# EAGLE board AtariST microATX (EAGLE 7.7.0), part 1 of 4
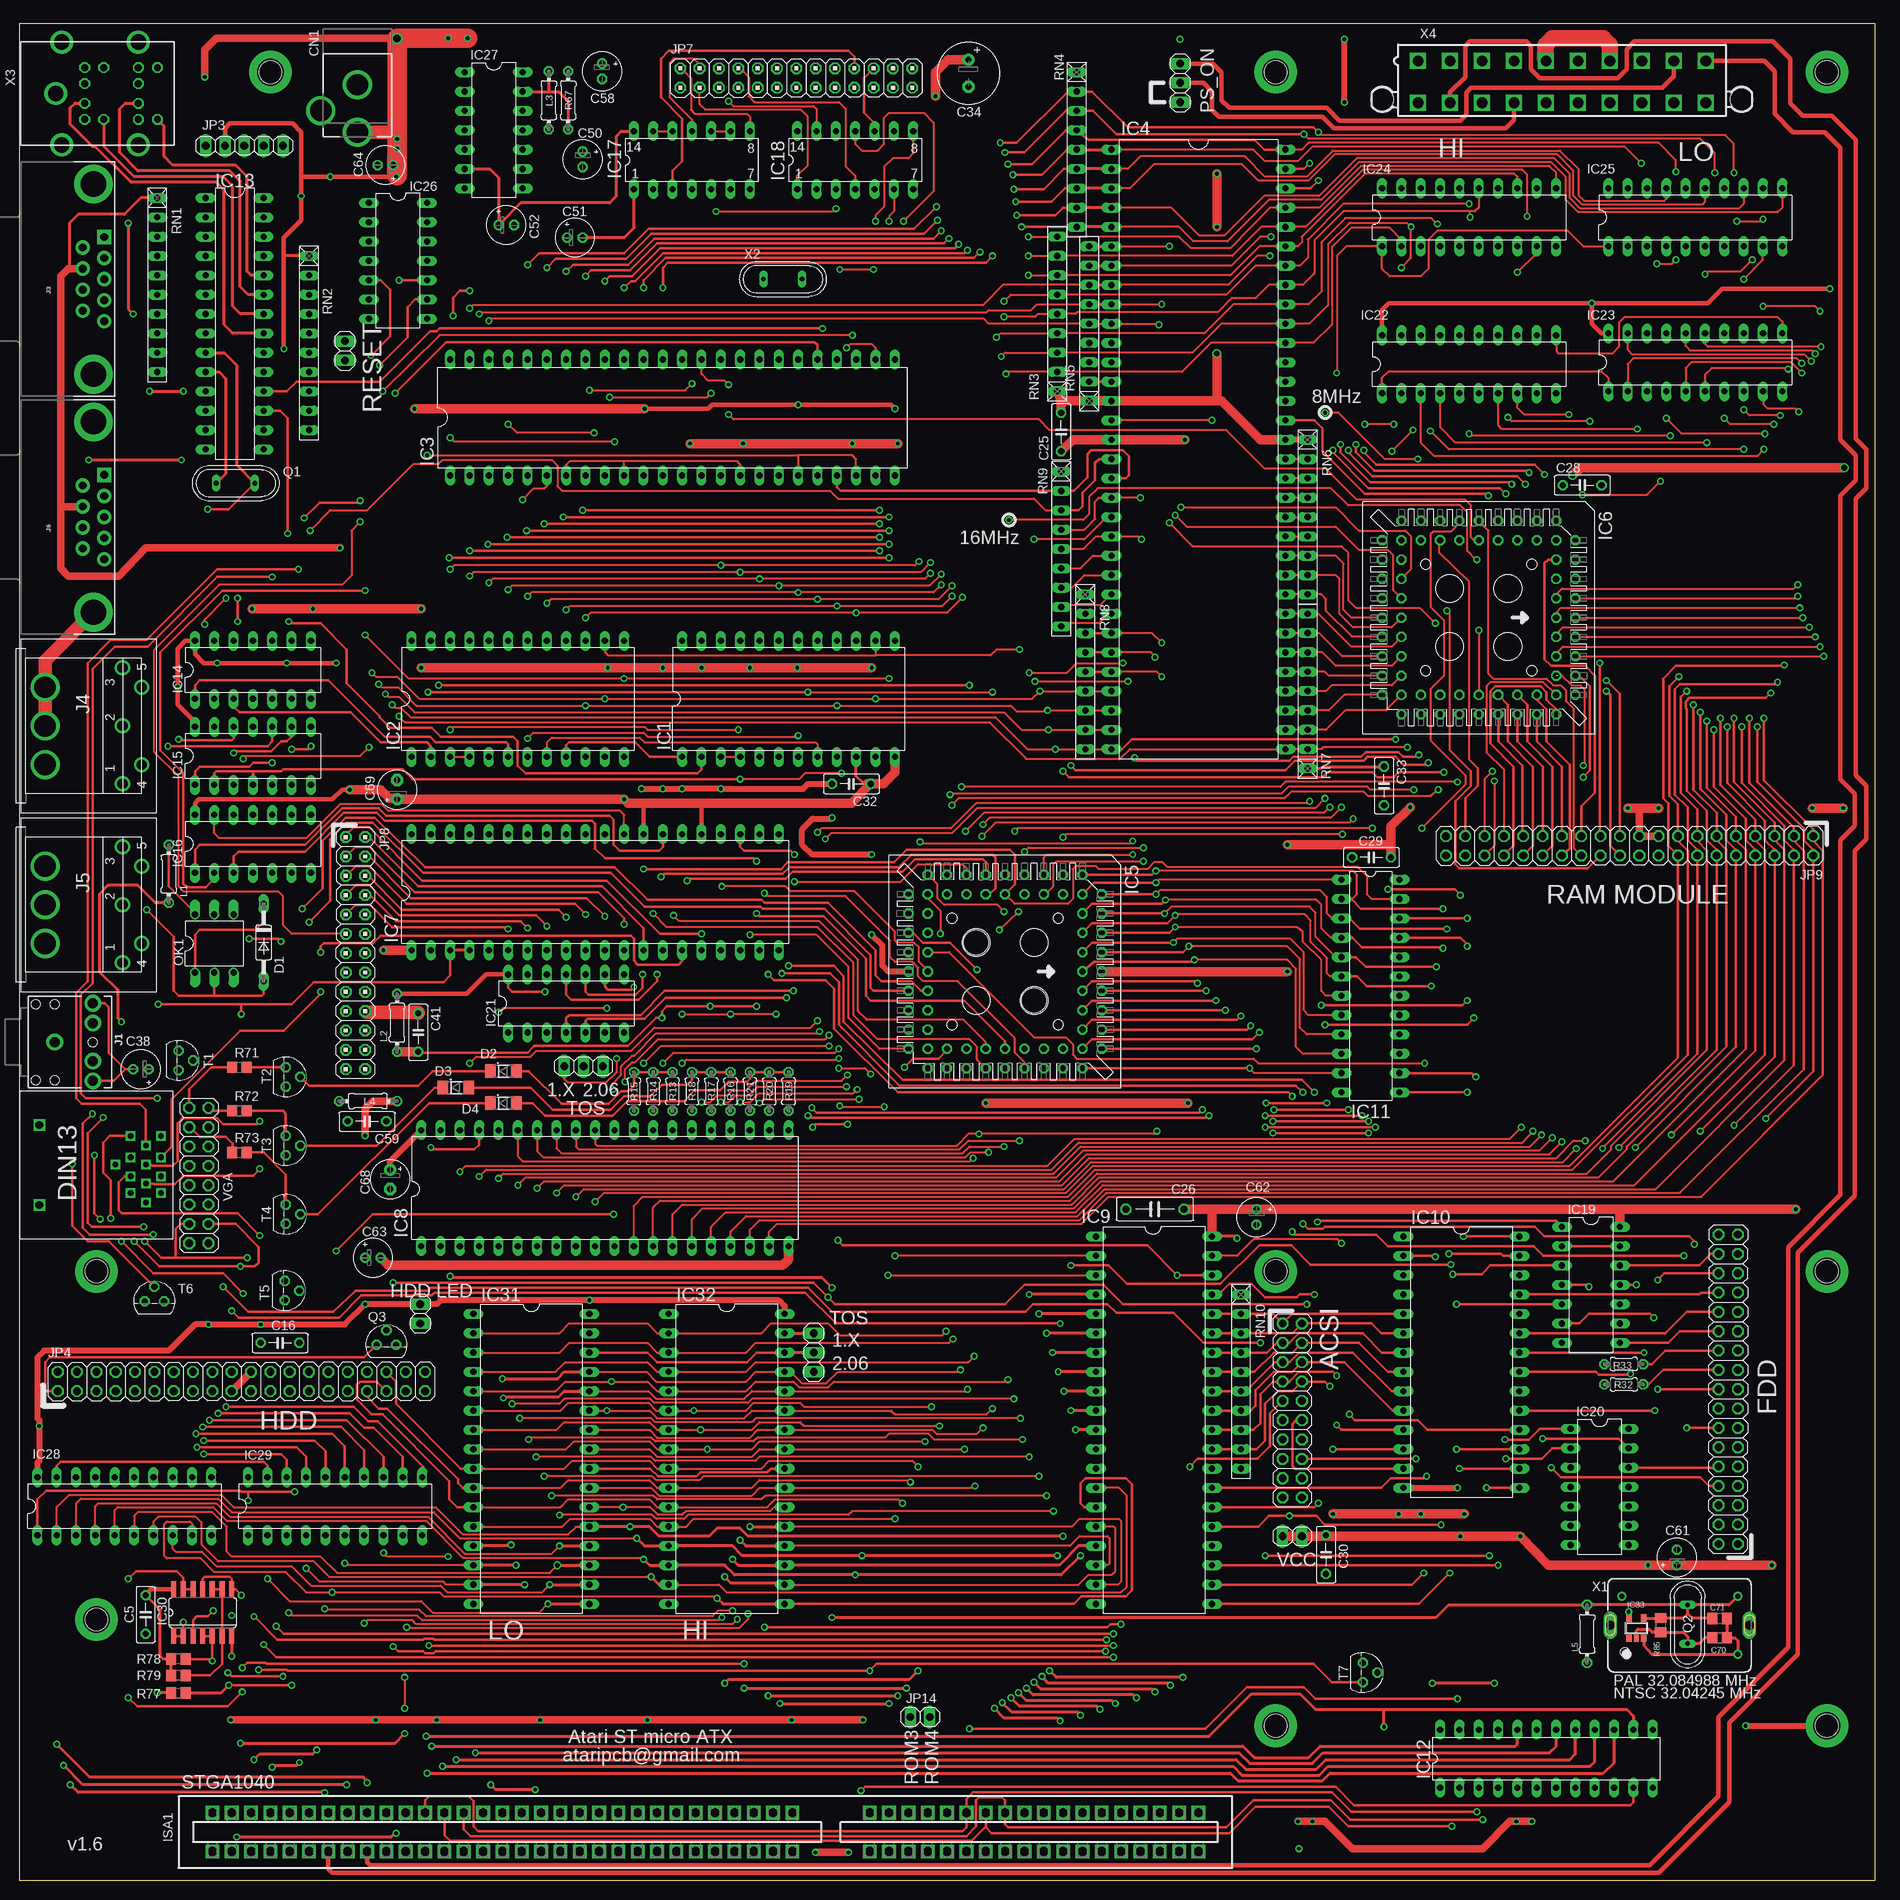
[diagram p0: board, top side]
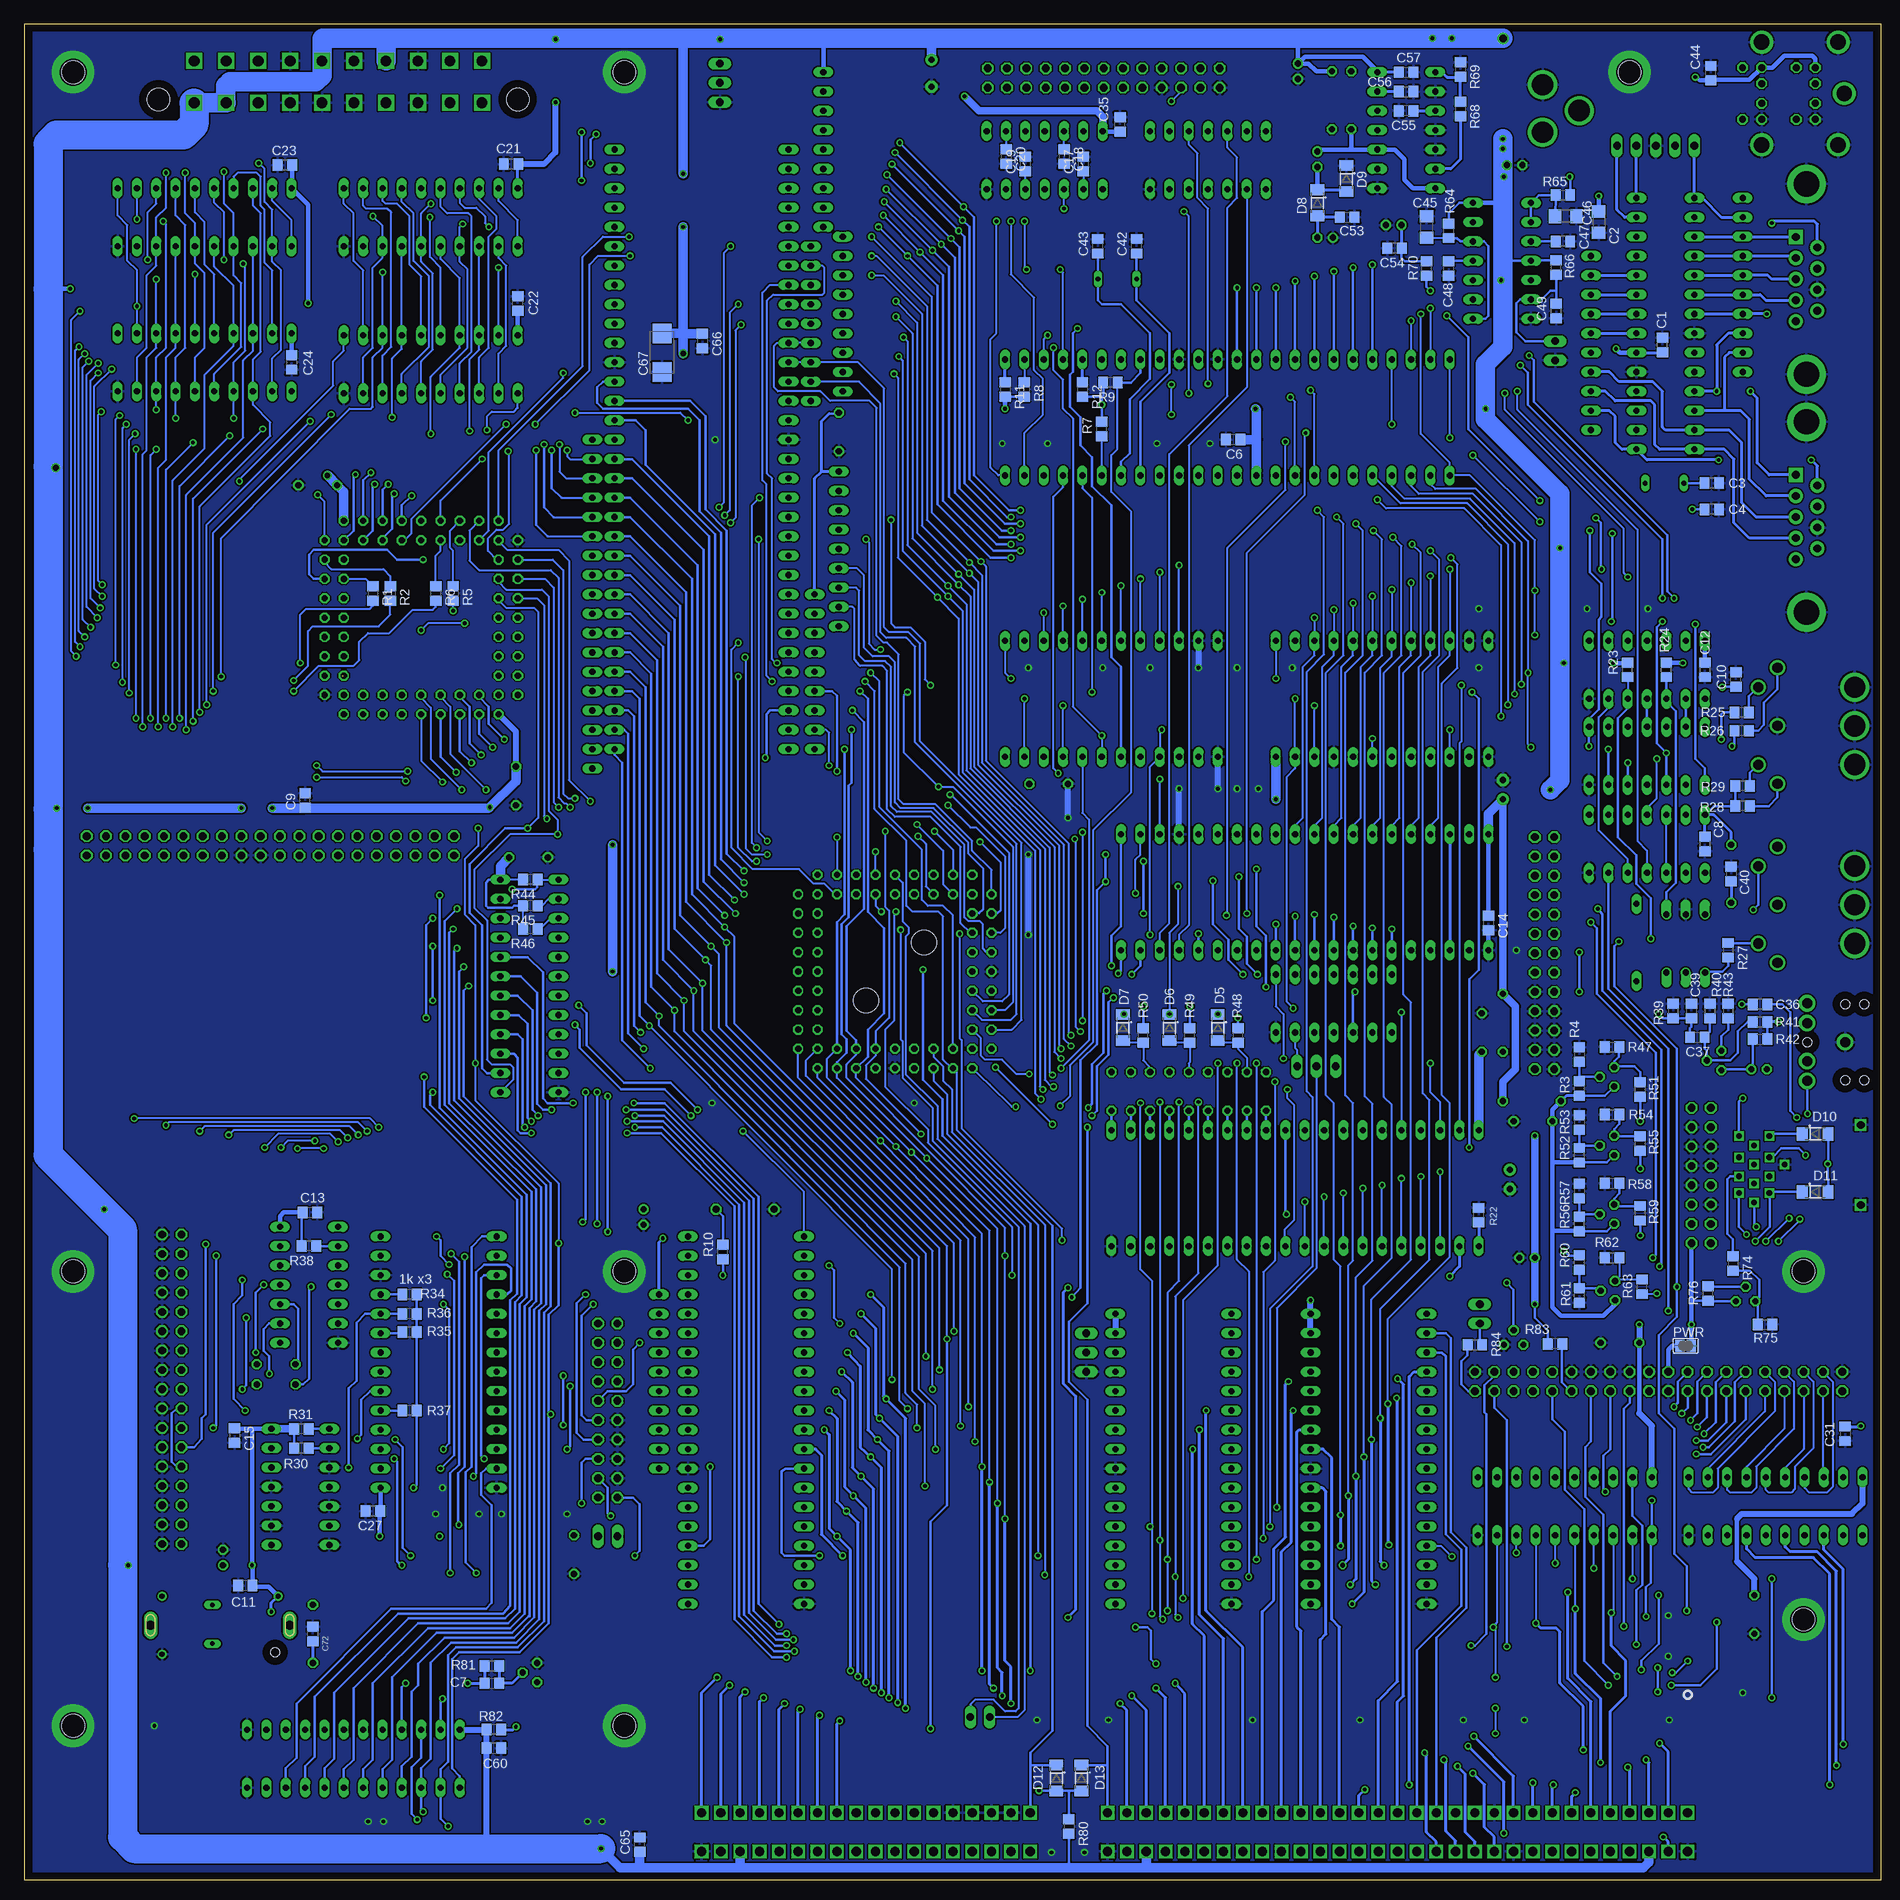
[diagram p1: board, bottom side, seen from below]

Size 243.84 x 243.84 mm. Coordinates in mm from the lower left corner, seen from the top.
Outline: 0,0 243.84,0 243.84,243.84 0,243.84 0,0
Copper layers (1*16): Top 0.035mm / dielectric 1.5mm / Bottom 0.035mm
Design rules "default": minimum track width 10mil, minimum drill 24mil, track to track 8mil, track to pad 8mil, pad to pad 8mil, via to via 8mil, smd to smd 8mil, copper to edge 40mil, drill to drill 8mil, minimum pad ring 10mil, minimum via ring 8mil, stop-mask expansion 4mil, vias tented up to drill 0mil, thermal gap 10mil
Holes 3 mm at 33.02,237.49 165.1,237.49 165.1,80.01 10.16,80.01 10.16,34.29 165.1,20.32 237.49,80.01 237.49,237.49 237.49,20.32
Holes 1.2 mm at 210.95,29.97
Holes 3.3 mm at 125.73,123.19 133.35,115.57

## Footprints (pad centres in the part's own frame; a part is rotated, then mirrored left to right if it is on the bottom)
C0805 = smd 1.3 x 1.5: 1 -0.95,0; 2 0.95,0
C1206 = smd 1.6 x 1.8: 1 -1.4,0; 2 1.4,0
C050-025X075 = drill 0.813 octagon: 1 -2.54,0; 2 2.54,0
C075-032X103 = drill 0.914 octagon: 1 -3.81,0; 2 3.81,0
E3,5-8 = drill 0.813 pad 1.6: + -1.778,0 | drill 0.813 pad 1.6 octagon: - 1.778,0
E2-5 = drill 0.813 pad 1.27: + -1.016,0 | drill 0.813 pad 1.27 octagon: - 1.016,0
C/6032-28R = smd 2.55 x 2.5: + 2.525,0; - -2.525,0
E2,5-5 = drill 0.813 pad 1.6: + -1.27,0 | drill 0.813 pad 1.6 octagon: - 1.27,0
DCJACK_2MM_PTH = drill 2.8: GND 0,7.35; GNDBREAK 4.8,10.75; PWR 0,13.6
DO35-10 = drill 0.813 long: A 5.08,0; C -5.08,0
SOD80_DO213AA_MINIMELF = smd 1.4 x 1.8: A 1.7,0; C -1.7,0
DIL24 = drill 0.813 long: 1 -13.97,-7.62; 2 -11.43,-7.62; 3 -8.89,-7.62; 4 -6.35,-7.62; 5 -3.81,-7.62; 6 -1.27,-7.62; 7 1.27,-7.62; 8 3.81,-7.62; 9 6.35,-7.62; 10 8.89,-7.62; 11 11.43,-7.62; 12 13.97,-7.62; 13 13.97,7.62; 14 11.43,7.62; 15 8.89,7.62; 16 6.35,7.62; 17 3.81,7.62; 18 1.27,7.62; 19 -1.27,7.62; 20 -3.81,7.62; 21 -6.35,7.62; 22 -8.89,7.62; 23 -11.43,7.62; 24 -13.97,7.62
DIL48 = drill 0.813 long: 1 -29.21,-7.62; 2 -26.67,-7.62; 3 -24.13,-7.62; 4 -21.59,-7.62; 5 -19.05,-7.62; 6 -16.51,-7.62; 7 -13.97,-7.62; 8 -11.43,-7.62; 9 -8.89,-7.62; 10 -6.35,-7.62; 11 -3.81,-7.62; 12 -1.27,-7.62; 13 1.27,-7.62; 14 3.81,-7.62; 15 6.35,-7.62; 16 8.89,-7.62; 17 11.43,-7.62; 18 13.97,-7.62; 19 16.51,-7.62; 20 19.05,-7.62; 21 21.59,-7.62; 22 24.13,-7.62; 23 26.67,-7.62; 24 29.21,-7.62; 25 29.21,7.62; 26 26.67,7.62; 27 24.13,7.62; 28 21.59,7.62; 29 19.05,7.62; 30 16.51,7.62; 31 13.97,7.62; 32 11.43,7.62; 33 8.89,7.62; 34 6.35,7.62; 35 3.81,7.62; 36 1.27,7.62; 37 -1.27,7.62; 38 -3.81,7.62; 39 -6.35,7.62; 40 -8.89,7.62; 41 -11.43,7.62; 42 -13.97,7.62; 43 -16.51,7.62; 44 -19.05,7.62; 45 -21.59,7.62; 46 -24.13,7.62; 47 -26.67,7.62; 48 -29.21,7.62
DIL64 = drill 0.813 long: 1 -39.37,-11.43; 2 -36.83,-11.43; 3 -34.29,-11.43; 4 -31.75,-11.43; 5 -29.21,-11.43; 6 -26.67,-11.43; 7 -24.13,-11.43; 8 -21.59,-11.43; 9 -19.05,-11.43; 10 -16.51,-11.43; 11 -13.97,-11.43; 12 -11.43,-11.43; 13 -8.89,-11.43; 14 -6.35,-11.43; 15 -3.81,-11.43; 16 -1.27,-11.43; 17 1.27,-11.43; 18 3.81,-11.43; 19 6.35,-11.43; 20 8.89,-11.43; 21 11.43,-11.43; 22 13.97,-11.43; 23 16.51,-11.43; 24 19.05,-11.43; 25 21.59,-11.43; 26 24.13,-11.43; 27 26.67,-11.43; 28 29.21,-11.43; 29 31.75,-11.43; 30 34.29,-11.43; 31 36.83,-11.43; 32 39.37,-11.43; 33 39.37,11.43; 34 36.83,11.43; 35 34.29,11.43; 36 31.75,11.43; 37 29.21,11.43; 38 26.67,11.43; 39 24.13,11.43; 40 21.59,11.43; 41 19.05,11.43; 42 16.51,11.43; 43 13.97,11.43; 44 11.43,11.43; 45 8.89,11.43; 46 6.35,11.43; 47 3.81,11.43; 48 1.27,11.43; 49 -1.27,11.43; 50 -3.81,11.43; 51 -6.35,11.43; 52 -8.89,11.43; 53 -11.43,11.43; 54 -13.97,11.43; 55 -16.51,11.43; 56 -19.05,11.43; 57 -21.59,11.43; 58 -24.13,11.43; 59 -26.67,11.43; 60 -29.21,11.43; 61 -31.75,11.43; 62 -34.29,11.43; 63 -36.83,11.43; 64 -39.37,11.43
PLCC68 = drill 0.813 octagon: 1 0,12.7; 2 0,10.16; 3 -2.54,12.7; 4 -2.54,10.16; 5 -5.08,12.7; 6 -5.08,10.16; 7 -7.62,12.7; 8 -7.62,10.16; 9 -10.16,12.7; 10 -12.7,10.16; 11 -10.16,10.16; 12 -12.7,7.62; 13 -10.16,7.62; 14 -12.7,5.08; 15 -10.16,5.08; 16 -12.7,2.54; 17 -10.16,2.54; 18 -12.7,0; 19 -10.16,0; 20 -12.7,-2.54; 21 -10.16,-2.54; 22 -12.7,-5.08; 23 -10.16,-5.08; 24 -12.7,-7.62; 25 -10.16,-7.62; 26 -12.7,-10.16; 27 -10.16,-12.7; 28 -10.16,-10.16; 29 -7.62,-12.7; 30 -7.62,-10.16; 31 -5.08,-12.7; 32 -5.08,-10.16; 33 -2.54,-12.7; 34 -2.54,-10.16; 35 0,-12.7; 36 0,-10.16; 37 2.54,-12.7; 38 2.54,-10.16; 39 5.08,-12.7; 40 5.08,-10.16; 41 7.62,-12.7; 42 7.62,-10.16; 43 10.16,-12.7; 44 12.7,-10.16; 45 10.16,-10.16; 46 12.7,-7.62; 47 10.16,-7.62; 48 12.7,-5.08; 49 10.16,-5.08; 50 12.7,-2.54; 51 10.16,-2.54; 52 12.7,0; 53 10.16,0; 54 12.7,2.54; 55 10.16,2.54; 56 12.7,5.08; 57 10.16,5.08; 58 12.7,7.62; 59 10.16,7.62; 60 12.7,10.16; 61 10.16,12.7; 62 10.16,10.16; 63 7.62,12.7; 64 7.62,10.16; 65 5.08,12.7; 66 5.08,10.16; 67 2.54,12.7; 68 2.54,10.16
DIL40 = drill 0.813 long: 1 -24.13,-7.62; 2 -21.59,-7.62; 3 -19.05,-7.62; 4 -16.51,-7.62; 5 -13.97,-7.62; 6 -11.43,-7.62; 7 -8.89,-7.62; 8 -6.35,-7.62; 9 -3.81,-7.62; 10 -1.27,-7.62; 11 1.27,-7.62; 12 3.81,-7.62; 13 6.35,-7.62; 14 8.89,-7.62; 15 11.43,-7.62; 16 13.97,-7.62; 17 16.51,-7.62; 18 19.05,-7.62; 19 21.59,-7.62; 20 24.13,-7.62; 21 24.13,7.62; 22 21.59,7.62; 23 19.05,7.62; 24 16.51,7.62; 25 13.97,7.62; 26 11.43,7.62; 27 8.89,7.62; 28 6.35,7.62; 29 3.81,7.62; 30 1.27,7.62; 31 -1.27,7.62; 32 -3.81,7.62; 33 -6.35,7.62; 34 -8.89,7.62; 35 -11.43,7.62; 36 -13.97,7.62; 37 -16.51,7.62; 38 -19.05,7.62; 39 -21.59,7.62; 40 -24.13,7.62
DIL28 = drill 0.813 long: 1 -16.51,-7.62; 2 -13.97,-7.62; 3 -11.43,-7.62; 4 -8.89,-7.62; 5 -6.35,-7.62; 6 -3.81,-7.62; 7 -1.27,-7.62; 8 1.27,-7.62; 9 3.81,-7.62; 10 6.35,-7.62; 11 8.89,-7.62; 12 11.43,-7.62; 13 13.97,-7.62; 14 16.51,-7.62; 15 16.51,7.62; 16 13.97,7.62; 17 11.43,7.62; 18 8.89,7.62; 19 6.35,7.62; 20 3.81,7.62; 21 1.27,7.62; 22 -1.27,7.62; 23 -3.81,7.62; 24 -6.35,7.62; 25 -8.89,7.62; 26 -11.43,7.62; 27 -13.97,7.62; 28 -16.51,7.62
DIL24-3 = drill 0.813 long: 1 -13.97,-3.81; 2 -11.43,-3.81; 3 -8.89,-3.81; 4 -6.35,-3.81; 5 -3.81,-3.81; 6 -1.27,-3.81; 7 1.27,-3.81; 8 3.81,-3.81; 9 6.35,-3.81; 10 8.89,-3.81; 11 11.43,-3.81; 12 13.97,-3.81; 13 13.97,3.81; 14 11.43,3.81; 15 8.89,3.81; 16 6.35,3.81; 17 3.81,3.81; 18 1.27,3.81; 19 -1.27,3.81; 20 -3.81,3.81; 21 -6.35,3.81; 22 -8.89,3.81; 23 -11.43,3.81; 24 -13.97,3.81
DIL28-3 = drill 0.813 long: 1 -16.51,-3.81; 2 -13.97,-3.81; 3 -11.43,-3.81; 4 -8.89,-3.81; 5 -6.35,-3.81; 6 -3.81,-3.81; 7 -1.27,-3.81; 8 1.27,-3.81; 9 3.81,-3.81; 10 6.35,-3.81; 11 8.89,-3.81; 12 11.43,-3.81; 13 13.97,-3.81; 14 16.51,-3.81; 15 16.51,3.81; 16 13.97,3.81; 17 11.43,3.81; 18 8.89,3.81; 19 6.35,3.81; 20 3.81,3.81; 21 1.27,3.81; 22 -1.27,3.81; 23 -3.81,3.81; 24 -6.35,3.81; 25 -8.89,3.81; 26 -11.43,3.81; 27 -13.97,3.81; 28 -16.51,3.81
DIL14 = drill 0.813 long: 1 -7.62,-3.81; 2 -5.08,-3.81; 3 -2.54,-3.81; 4 0,-3.81; 5 2.54,-3.81; 6 5.08,-3.81; 7 7.62,-3.81; 8 7.62,3.81; 9 5.08,3.81; 10 2.54,3.81; 11 0,3.81; 12 -2.54,3.81; 13 -5.08,3.81; 14 -7.62,3.81
DIL14' = drill 0.8 long: 1 -7.62,-3.81; 2 -5.08,-3.81; 3 -2.54,-3.81; 4 0,-3.81; 5 2.54,-3.81; 6 5.08,-3.81; 7 7.62,-3.81; 8 7.62,3.81; 9 5.08,3.81; 10 2.54,3.81; 11 0,3.81; 12 -2.54,3.81; 13 -5.08,3.81; 14 -7.62,3.81
DIL20 = drill 0.813 long: 1 -11.43,-3.81; 2 -8.89,-3.81; 3 -6.35,-3.81; 4 -3.81,-3.81; 5 -1.27,-3.81; 6 1.27,-3.81; 7 3.81,-3.81; 8 6.35,-3.81; 9 8.89,-3.81; 10 11.43,-3.81; 11 11.43,3.81; 12 8.89,3.81; 13 6.35,3.81; 14 3.81,3.81; 15 1.27,3.81; 16 -1.27,3.81; 17 -3.81,3.81; 18 -6.35,3.81; 19 -8.89,3.81; 20 -11.43,3.81
SO14 = smd 0.66 x 2.032: 1 -3.81,-3.073; 2 -2.54,-3.073; 3 -1.27,-3.073; 4 0,-3.073; 5 1.27,-3.073; 6 2.54,-3.073; 7 3.81,-3.073; 8 3.81,3.073; 9 2.54,3.073; 10 1.27,3.073; 11 0,3.073; 12 -1.27,3.073; 13 -2.54,3.073; 14 -3.81,3.073
DIL32 = drill 0.813 long: 1 -19.05,-7.62; 2 -16.51,-7.62; 3 -13.97,-7.62; 4 -11.43,-7.62; 5 -8.89,-7.62; 6 -6.35,-7.62; 7 -3.81,-7.62; 8 -1.27,-7.62; 9 1.27,-7.62; 10 3.81,-7.62; 11 6.35,-7.62; 12 8.89,-7.62; 13 11.43,-7.62; 14 13.97,-7.62; 15 16.51,-7.62; 16 19.05,-7.62; 17 19.05,7.62; 18 16.51,7.62; 19 13.97,7.62; 20 11.43,7.62; 21 8.89,7.62; 22 6.35,7.62; 23 3.81,7.62; 24 1.27,7.62; 25 -1.27,7.62; 26 -3.81,7.62; 27 -6.35,7.62; 28 -8.89,7.62; 29 -11.43,7.62; 30 -13.97,7.62; 31 -16.51,7.62; 32 -19.05,7.62
SOT23-5 = smd 0.69 x 0.99: 1 -0.95,-1.29; 2 0,-1.29; 3 0.95,-1.29; 4 0.95,1.3; 5 -0.95,1.3
ISA-16 = drill 1.2 pad 1.778 square: A1 81.28,-2.54; A2 78.74,-2.54; A3 76.2,-2.54; A4 73.66,-2.54; A5 71.12,-2.54; A6 68.58,-2.54; A7 66.04,-2.54; A8 63.5,-2.54; A9 60.96,-2.54; A10 58.42,-2.54; A11 55.88,-2.54; A12 53.34,-2.54; A13 50.8,-2.54; A14 48.26,-2.54; A15 45.72,-2.54; A16 43.18,-2.54; A17 40.64,-2.54; A18 38.1,-2.54; A19 35.56,-2.54; A20 33.02,-2.54; A21 30.48,-2.54; A22 27.94,-2.54; A23 25.4,-2.54; A24 22.86,-2.54; A25 20.32,-2.54; A26 17.78,-2.54; A27 15.24,-2.54; A28 12.7,-2.54; A29 10.16,-2.54; A30 7.62,-2.54; A31 5.08,-2.54; B1 81.28,2.54; B2 78.74,2.54; B3 76.2,2.54; B4 73.66,2.54; B5 71.12,2.54; B6 68.58,2.54; B7 66.04,2.54; B8 63.5,2.54; B9 60.96,2.54; B10 58.42,2.54; B11 55.88,2.54; B12 53.34,2.54; B13 50.8,2.54; B14 48.26,2.54; B15 45.72,2.54; B16 43.18,2.54; B17 40.64,2.54; B18 38.1,2.54; B19 35.56,2.54; B20 33.02,2.54; B21 30.48,2.54; B22 27.94,2.54; B23 25.4,2.54; B24 22.86,2.54; B25 20.32,2.54; B26 17.78,2.54; B27 15.24,2.54; B28 12.7,2.54; B29 10.16,2.54; B30 7.62,2.54; B31 5.08,2.54; C1 -5.08,-2.54; C2 -7.62,-2.54; C3 -10.16,-2.54; C4 -12.7,-2.54; C5 -15.24,-2.54; C6 -17.78,-2.54; C7 -20.32,-2.54; C8 -22.86,-2.54; C9 -25.4,-2.54; C10 -27.94,-2.54; C11 -30.48,-2.54; C12 -33.02,-2.54; C13 -35.56,-2.54; C14 -38.1,-2.54; C15 -40.64,-2.54; C16 -43.18,-2.54; C17 -45.72,-2.54; C18 -48.26,-2.54; D1 -5.08,2.54; D2 -7.62,2.54; D3 -10.16,2.54; D4 -12.7,2.54; D5 -15.24,2.54; D6 -17.78,2.54; D7 -20.32,2.54; D8 -22.86,2.54; D9 -25.4,2.54; D10 -27.94,2.54; D11 -30.48,2.54; D12 -33.02,2.54; D13 -35.56,2.54; D14 -38.1,2.54; D15 -40.64,2.54; D16 -43.18,2.54; D17 -45.72,2.54; D18 -48.26,2.54
AUDIO-JACK-KIT = drill 1.3 pad 2.184: RING 5,5.1; RSH 5,2.5; SLEEVE 0,0; TIP 5,-5.1; TSH 5,-2.5 | hole 1.2: 0,5; -2.5,5; -2.5,-5; 0,-5; 5,0
DB9_MALE = drill 1.016 pad 1.88 square: 1 5.54,-1.42 | drill 1.016 pad 1.88: 2 2.77,-1.42; 3 0,-1.42; 4 -2.77,-1.42; 5 -5.54,-1.42; 6 4.15,1.42; 7 1.38,1.42; 8 -1.38,1.42; 9 -4.15,1.42 | drill 3.302 pad 5.08: G1 -12.5,0; G2 12.5,0
DIN5 = drill 1.321: 1 -7.62,-6.35; 2 0,-6.35; 3 7.62,-6.35; 4 -5.08,-8.89; 5 5.08,-8.89 | drill 2.8: SHIELD1 5.08,3.81; SHIELD2 0,3.81; SHIELD3 -5.08,3.81
1X02 = drill 1.016 long: 1 -1.27,0; 2 1.27,0
1X05 = drill 1.016 long: 1 -5.08,0; 2 -2.54,0; 3 0,0; 4 2.54,0; 5 5.08,0
2X20 = drill 1.016 octagon: 1 -24.13,-1.27; 2 -24.13,1.27; 3 -21.59,-1.27; 4 -21.59,1.27; 5 -19.05,-1.27; 6 -19.05,1.27; 7 -16.51,-1.27; 8 -16.51,1.27; 9 -13.97,-1.27; 10 -13.97,1.27; 11 -11.43,-1.27; 12 -11.43,1.27; 13 -8.89,-1.27; 14 -8.89,1.27; 15 -6.35,-1.27; 16 -6.35,1.27; 17 -3.81,-1.27; 18 -3.81,1.27; 19 -1.27,-1.27; 20 -1.27,1.27; 21 1.27,-1.27; 22 1.27,1.27; 23 3.81,-1.27; 24 3.81,1.27; 25 6.35,-1.27; 26 6.35,1.27; 27 8.89,-1.27; 28 8.89,1.27; 29 11.43,-1.27; 30 11.43,1.27; 31 13.97,-1.27; 32 13.97,1.27; 33 16.51,-1.27; 34 16.51,1.27; 35 19.05,-1.27; 36 19.05,1.27; 37 21.59,-1.27; 38 21.59,1.27; 39 24.13,-1.27; 40 24.13,1.27
2X17 = drill 1.016 octagon: 1 -20.32,-1.27; 2 -20.32,1.27; 3 -17.78,-1.27; 4 -17.78,1.27; 5 -15.24,-1.27; 6 -15.24,1.27; 7 -12.7,-1.27; 8 -12.7,1.27; 9 -10.16,-1.27; 10 -10.16,1.27; 11 -7.62,-1.27; 12 -7.62,1.27; 13 -5.08,-1.27; 14 -5.08,1.27; 15 -2.54,-1.27; 16 -2.54,1.27; 17 0,-1.27; 18 0,1.27; 19 2.54,-1.27; 20 2.54,1.27; 21 5.08,-1.27; 22 5.08,1.27; 23 7.62,-1.27; 24 7.62,1.27; 25 10.16,-1.27; 26 10.16,1.27; 27 12.7,-1.27; 28 12.7,1.27; 29 15.24,-1.27; 30 15.24,1.27; 31 17.78,-1.27; 32 17.78,1.27; 33 20.32,-1.27; 34 20.32,1.27
2X10 = drill 1.016 octagon: 1 -11.43,-1.27; 2 -11.43,1.27; 3 -8.89,-1.27; 4 -8.89,1.27; 5 -6.35,-1.27; 6 -6.35,1.27; 7 -3.81,-1.27; 8 -3.81,1.27; 9 -1.27,-1.27; 10 -1.27,1.27; 11 1.27,-1.27; 12 1.27,1.27; 13 3.81,-1.27; 14 3.81,1.27; 15 6.35,-1.27; 16 6.35,1.27; 17 8.89,-1.27; 18 8.89,1.27; 19 11.43,-1.27; 20 11.43,1.27
2X13 = drill 1.016 octagon: 1 -15.24,-1.27; 2 -15.24,1.27; 3 -12.7,-1.27; 4 -12.7,1.27; 5 -10.16,-1.27; 6 -10.16,1.27; 7 -7.62,-1.27; 8 -7.62,1.27; 9 -5.08,-1.27; 10 -5.08,1.27; 11 -2.54,-1.27; 12 -2.54,1.27; 13 0,-1.27; 14 0,1.27; 15 2.54,-1.27; 16 2.54,1.27; 17 5.08,-1.27; 18 5.08,1.27; 19 7.62,-1.27; 20 7.62,1.27; 21 10.16,-1.27; 22 10.16,1.27; 23 12.7,-1.27; 24 12.7,1.27; 25 15.24,-1.27; 26 15.24,1.27
1X03 = drill 1.016 long: 1 -2.54,0; 2 0,0; 3 2.54,0
0204/7 = drill 0.813 octagon: 1 -3.81,0; 2 3.81,0
DIL06 = drill 0.813 offset: 1 -2.54,-3.81; 2 0,-3.81; 3 2.54,-3.81; 4 2.54,3.81; 5 0,3.81; 6 -2.54,3.81
SJ = smd 1.168 x 1.6: 1 -0.762,0; 2 0.762,0
QS = drill 0.61 long: 1 -2.54,0; 2 2.54,0
TO92 = drill 0.813 octagon: 1 1.27,0; 2 0,1.905; 3 -1.27,0
R0805 = smd 1.3 x 1.5: 1 -0.95,0; 2 0.95,0
0204/5 = drill 0.813 octagon: 1 -2.54,0; 2 2.54,0
RN-10 = drill 0.813 long: 1 -11.43,0; 2 -8.89,0; 3 -6.35,0; 4 -3.81,0; 5 -1.27,0; 6 1.27,0; 7 3.81,0; 8 6.35,0; 9 8.89,0; 10 11.43,0
RN-9 = drill 0.813 long: 1 -10.16,0; 2 -7.62,0; 3 -5.08,0; 4 -2.54,0; 5 0,0; 6 2.54,0; 7 5.08,0; 8 7.62,0; 9 10.16,0
DIN-13 = drill 1 square: M1 -5.25,7.5; M2 5.25,7.5 | drill 0.75 square: PIN1 -3.7,-8.5; PIN2 -1.5,-8.5; PIN3 1,-8.5; PIN4 3.8,-8.5; PIN5 -4.95,-6.5; PIN6 -2.45,-6.5; PIN7 0.05,-6.5; PIN8 2.55,-6.5; PIN9 -3.7,-4.5; PIN10 -1.5,-4.5; PIN11 1,-4.5; PIN12 3.8,-4.5; PIN13 0.05,-2.5
2X08 = drill 1.016 octagon: 1 -8.89,-1.27; 2 -8.89,1.27; 3 -6.35,-1.27; 4 -6.35,1.27; 5 -3.81,-1.27; 6 -3.81,1.27; 7 -1.27,-1.27; 8 -1.27,1.27; 9 1.27,-1.27; 10 1.27,1.27; 11 3.81,-1.27; 12 3.81,1.27; 13 6.35,-1.27; 14 6.35,1.27; 15 8.89,-1.27; 16 8.89,1.27
TC46 = drill 0.7 pad 1.016: 7 7.62,-3.81; 8 7.62,3.81; 14 -7.62,3.81 | drill 1.2 pad 1.6 long: S@1 -9.144,0 | drill 1.2 pad 1.5 long: S@2 9.144,0
SSV-BD06 = drill 0.9 octagon: 1-1 1.3,8.5; 1-2 -1.3,8.5; 1-3 3.4,8.5; 1-4 -3.4,8.5; 1-5 3.4,11; 1-6 -3.4,11; 2-1 1.3,15.55; 2-2 -1.3,15.55; 2-3 3.4,15.55; 2-4 -3.4,15.55; 2-5 3.4,18.05; 2-6 -3.4,18.05 | drill 2: G1 -6.75,15.55; G2 6.75,15.55; G3 -6.75,5.5; G4 6.75,5.5; GND 0,4.7
5566-20 = drill 1.4 square: 1 18.9,-2.75; 2 14.7,-2.75; 3 10.5,-2.75; 4 6.3,-2.75; 5 2.1,-2.75; 6 -2.1,-2.75; 7 -6.3,-2.75; 8 -10.5,-2.75; 9 -14.7,-2.75; 10 -18.9,-2.75; 11 18.9,2.75; 12 14.7,2.75; 13 10.5,2.75; 14 6.3,2.75; 15 2.1,2.75; 16 -2.1,2.75; 17 -6.3,2.75; 18 -10.5,2.75; 19 -14.7,2.75; 20 -18.9,2.75 | hole 3: 23.6,2.29; -23.6,2.29

## Placement (x,y rotation side)
C1  100n  [C0805]  28.7,201.68 90 bottom
C2  10u  [C1206]  37.08,217.81 270 bottom
C3  22p  [C0805]  22.23,183.51 180 bottom
C4  22p  [C0805]  22.23,180.09 180 bottom
C5  [C050-025X075]  16.64,34.92 270 top
C6  [C0805]  85.09,189.23 180 bottom
C7  100p  [C0805]  182.5,25.91 0 bottom
C8  [C0805]  23.11,136.14 270 bottom
C9  [C0805]  207.01,141.86 90 bottom
C10  [C0805]  19.05,157.73 90 bottom
C11  [C0805]  214.88,38.73 180 bottom
C12  [C0805]  23.11,159 270 bottom
C13  [C0805]  206.38,87.76 0 bottom
C14  [C0805]  51.56,125.73 270 bottom
C15  [C0805]  216.28,58.42 270 bottom
C16  [C050-025X075]  34.29,70.61 0 top
C17  100p  [C0805]  104.78,225.43 90 bottom
C18  100p  [C0805]  107.31,226.44 270 bottom
C19  100p  [C0805]  112.39,225.43 90 bottom
C20  100p  [C0805]  114.94,226.44 270 bottom
C21  [C0805]  179.96,225.43 180 bottom
C22  [C0805]  179.07,207.14 90 bottom
C23  [C0805]  209.68,225.3 180 bottom
C24  [C0805]  208.79,199.39 270 bottom
C25  [C050-025X075]  136.91,190.25 270 top
C26  [C075-032X103]  149.22,88.14 180 top
C27  [C0805]  198.12,48.51 180 bottom
C28  [C050-025X075]  205.36,183.26 0 top
C29  [C050-025X075]  177.67,134.37 180 top
C30  [C050-025X075]  171.7,42.8 270 top
C31  [C0805]  4.7,58.67 270 bottom
C32  [C050-025X075]  109.35,144.02 180 top
C33  [C050-025X075]  179.32,143.76 270 top
C34  470u  [E3,5-8]  124.71,237.36 270 top
C35  [C0805]  99.95,230.63 90 bottom
C36  1u  [C0805]  15.88,115.06 180 bottom
C37  1u  [C0805]  24.13,110.74 0 bottom
C38  47u  [E2-5]  16,106.55 180 top
C39  100n  [C0805]  24.89,114.17 270 bottom
C40  100n  [C0805]  19.68,132.21 270 bottom
C41  100n  [C050-025X075]  52.45,111.38 270 top
C42  30p  [C0805]  97.79,214.63 90 bottom
C43  30p  [C0805]  102.87,214.63 90 bottom
C44  [C0805]  22.35,237.36 90 bottom
C45  22u  [C1206]  59.69,217.17 270 bottom
C46  22u  [C1206]  41.4,218.57 180 bottom
C47  10n  [C0805]  41.78,215.26 180 bottom
C48  10n  [C0805]  56.77,211.71 90 bottom
C49  100n  [C0805]  42.67,206.12 90 bottom
C50  4u7  [E2-5]  74.04,226.06 270 top
C51  4u7  [E2-5]  73.03,215.77 0 top
C52  4u7  [E2-5]  64.01,217.42 0 top
C53  100n  [C0805]  70.1,218.44 0 bottom
C54  100n  [C0805]  63.88,214.38 180 bottom
C55  330p  [C0805]  62.36,232.41 180 bottom
C56  150p  [C0805]  62.36,234.95 0 bottom
C57  100n  [C0805]  62.36,237.49 0 bottom
C58  10u  [E2-5]  76.58,237.62 270 top
C59  [C050-025X075]  45.72,99.69 0 top
C60  [C0805]  182.25,17.4 0 bottom
C61  47u  [E2-5]  217.81,42.42 90 top
C62  47  [E2-5]  162.56,87.12 270 top
C63  47u  [E2-5]  46.48,81.79 0 top
C64  47u  [E2-5]  48.13,225.3 180 top
C65  10u  [C0805]  163.07,4.7 90 bottom
C66  [C0805]  154.81,202.18 270 bottom
C67  [C/6032-28R]  160.15,200.66 90 bottom
C68  47u  [E2,5-5]  48.77,92.08 270 top
C69  47u  [E2,5-5]  49.66,143.26 90 top
C70  15p  [C0805]  223.39,31.88 0 top
C71  15p  [C0805]  223.39,34.42 0 top
C72  opt  [C0805]  205.99,32.38 90 bottom
CN1  [DCJACK_2MM_PTH]  44.45,243.21 180 top
D1  1N914  [DO35-10]  32.13,123.19 270 top
D2  LL4148  [SOD80_DO213AA_MINIMELF]  63.63,106.3 0 top
D3  LL4148  [SOD80_DO213AA_MINIMELF]  57.4,104.14 0 top
D4  LL4148  [SOD80_DO213AA_MINIMELF]  63.63,102.11 0 top
D5  LL4148  [SOD80_DO213AA_MINIMELF]  87.12,112.01 270 bottom
D6  LL4148  [SOD80_DO213AA_MINIMELF]  93.47,112.01 270 bottom
D7  LL4148  [SOD80_DO213AA_MINIMELF]  99.57,112.01 270 bottom
D8  LL4148  [SOD80_DO213AA_MINIMELF]  74.04,220.34 270 bottom
D9  LL4148  [SOD80_DO213AA_MINIMELF]  70.23,223.52 270 bottom
D10  LL4148  [SOD80_DO213AA_MINIMELF]  8.64,98.04 0 bottom
D11  LL4148  [SOD80_DO213AA_MINIMELF]  8.64,90.42 0 bottom
D12  LL4148  [SOD80_DO213AA_MINIMELF]  108.33,13.46 270 bottom
D13  LL4148  [SOD80_DO213AA_MINIMELF]  105.03,13.46 270 bottom
IC1  6850  [DIL24]  101.09,155.19 0 top
IC2  6850  [DIL24]  65.53,155.19 0 top
IC3  MC68901P  [DIL48]  85.85,192.15 0 top
IC4  MC68000  [DIL64]  154.94,187.96 270 top
IC5  GLUE  [PLCC68]  129.54,119.38 270 top
IC6  MMU  [PLCC68]  191.77,165.86 270 top
IC7  YM2149  [DIL40]  75.69,129.79 0 top
IC8  SHIFTER  [DIL40]  76.96,90.93 0 top
IC9  DMA  [DIL40]  149.1,60.45 270 top
IC10  WD1772  [DIL28]  189.48,68.07 270 top
IC11  [DIL24-3]  177.55,117.47 270 top
IC12  [DIL24-3]  200.66,16 0 top
IC13  PIC16F876  [DIL28-3]  28.32,204.47 270 top
IC14  74LS04N  [DIL14]  30.73,159 0 top
IC15  74LS05N  [DIL14]  30.73,147.7 0 top
IC16  74LS02N  [DIL14]  30.73,136.14 0 top
IC17  1488N  [DIL14']  88.39,225.93 0 top
IC18  1489N  [DIL14']  109.86,225.93 0 top
IC19  74LS06N  [DIL14]  206.5,78.23 270 top
IC20  74LS06N  [DIL14]  207.65,51.69 270 top
IC21  74LS11N  [DIL14]  71.88,115.19 0 top
IC22  74LS373N  [DIL20]  190.5,199.14 0 top
IC23  74LS373N  [DIL20]  220.22,199.39 0 top
IC24  74LS244N  [DIL20]  190.5,218.44 0 top
IC25  74LS244N  [DIL20]  220.22,218.44 0 top
IC26  NE556  [DIL14]  49.78,212.72 270 top
IC27  [DIL14]  62.36,229.87 270 top
IC28  74HCT245N  [DIL20]  13.84,49.15 0 top
IC29  74HCT245N  [DIL20]  41.53,49.15 0 top
IC30  74LS03  [SO14]  24.13,35.18 0 top
IC31  39SF020  [DIL32]  67.31,55.37 270 top
IC32  39SF020  [DIL32]  92.96,55.37 270 top
IC33  74LVC1GU04  [SOT23-5]  212.47,33.15 0 top
ISA1  [ISA-16]  106.68,6.35 180 top
J1  AUDIO_JACK_3.5MM_KIT  [AUDIO-JACK-KIT]  4.7,110.11 0 top
J3  [DB9_MALE]  9.78,210.31 90 top
J4  MIDI_OUT  [DIN5]  7.24,151.64 90 top
J5  MIDI_IN  [DIN5]  7.24,128.14 90 top
J6  [DB9_MALE]  9.78,179.07 90 top
JP1  [1X02]  42.8,200.91 90 top
JP2  [1X02]  167.26,45.21 0 top
JP3  ISP  [1X05]  29.59,227.84 0 top
JP4  [2X20]  29.21,65.53 0 top
JP5  [2X17]  224.54,64.52 90 top
JP6  [2X10]  167.26,61.72 270 top
JP7  RS232  [2X13]  102.11,236.73 0 top
JP8  LPT  [2X13]  44.2,121.79 270 top
JP9  [2X20]  211.58,135.89 180 top
JP10  [1X02]  52.7,74.42 270 top
JP11  [1X03]  74.17,106.93 180 top
JP12  [1X03]  104.39,69.34 270 top
JP13  [1X03]  152.53,236.09 90 top
JP14  [1X02]  118.36,21.46 0 top
L1  [0204/7]  19.68,132.21 90 top
L2  [0204/7]  49.66,112.65 90 top
L3  220uH  [0204/7]  69.6,233.81 270 top
L4  [0204/7]  45.85,102.36 0 top
L5  opt  [0204/7]  205.99,32.38 270 top
OK1  PC900  [DIL06]  25.65,123.06 0 top
PWR  [SJ]  25.65,70.23 0 bottom
Q1  4MHz  [QS]  28.45,183.51 0 top
Q2  [QS]  219.2,33.66 90 top
Q3  2N3906  [TO92]  48.26,70.36 0 top
R1  68  [R0805]  198.12,169.04 270 bottom
R2  68  [R0805]  195.83,169.04 270 bottom
R3  5k1  [R0805]  39.62,104.01 90 bottom
R4  3k6  [R0805]  39.62,108.46 270 bottom
R5  68  [R0805]  187.58,169.04 270 bottom
R6  68  [R0805]  189.87,169.04 270 bottom
R7  1k  [R0805]  102.36,190.63 90 bottom
R8  1k  [R0805]  112.52,195.83 270 bottom
R9  1k  [R0805]  101.22,196.72 180 bottom
R10  1k  [R0805]  152.15,82.55 90 bottom
R11  4k7  [R0805]  115.06,195.83 270 bottom
R12  1k  [R0805]  104.9,195.83 270 bottom
R13  3k6  [0204/5]  85.85,103.63 90 top
R14  7k5  [0204/5]  83.31,103.63 90 top
R15  15k  [0204/5]  80.77,103.63 90 top
R16  3k6  [0204/5]  93.47,103.63 90 top
R17  7k5  [0204/5]  90.93,103.63 90 top
R18  15k  [0204/5]  88.39,103.63 90 top
R19  3k6  [0204/5]  101.09,103.63 90 top
R20  7k5  [0204/5]  98.55,103.63 90 top
R21  15k  [0204/5]  96.01,103.63 90 top
R22  10k  [R0805]  52.83,87.38 90 bottom
R23  1k  [R0805]  33.27,159 90 bottom
R24  4k7  [R0805]  28.19,159 90 bottom
R25  220  [R0805]  18.29,153.42 180 bottom
R26  220  [R0805]  18.29,151 180 bottom
R27  220  [R0805]  20.07,122.17 270 bottom
R28  220  [R0805]  18.16,141.1 180 bottom
R29  220  [R0805]  18.16,143.76 180 bottom
R30  4k7  [R0805]  207.52,56.77 180 bottom
R31  1k  [R0805]  207.52,59.31 180 bottom
R32  47  [0204/5]  210.82,65.15 180 top
R33  47  [0204/5]  210.82,67.82 180 top
R34  1k  [R0805]  193.29,76.96 180 bottom
R35  1k  [R0805]  193.29,72.01 180 bottom
R36  1k  [R0805]  193.29,74.42 180 bottom
R37  220  [R0805]  193.29,61.72 180 bottom
R38  1k  [R0805]  206.5,83.31 180 bottom
R39  1k  [R0805]  27.3,114.17 270 bottom
R40  3k  [R0805]  22.48,114.17 270 bottom
R41  8k2  [R0805]  15.88,112.78 0 bottom
R42  820  [R0805]  15.88,110.49 0 bottom
R43  220  [R0805]  20.07,114.17 270 bottom
R44  10k  [R0805]  177.42,131.44 180 bottom
R45  10k  [R0805]  177.42,128.02 180 bottom
R46  10k  [R0805]  177.42,124.97 180 bottom
R47  100  [R0805]  35.31,109.47 0 bottom
R48  2k4  [R0805]  84.45,111 90 bottom
R49  2k4  [R0805]  90.81,111 90 bottom
R50  2k4  [R0805]  96.9,111 90 bottom
R51  27  [R0805]  31.62,103.89 90 bottom
R52  5k1  [R0805]  39.62,95.25 90 bottom
R53  3k6  [R0805]  39.62,99.57 270 bottom
R54  100  [R0805]  35.31,100.58 0 bottom
R55  27  [R0805]  31.62,96.77 90 bottom
R56  5k1  [R0805]  39.62,86.23 90 bottom
R57  3k6  [R0805]  39.62,90.55 270 bottom
R58  100  [R0805]  35.31,91.57 0 bottom
R59  27  [R0805]  31.62,87.63 90 bottom
R60  1k  [R0805]  39.62,81.15 90 bottom
R61  1k  [R0805]  39.62,76.83 90 bottom
R62  100  [R0805]  35.31,81.79 0 bottom
R63  27  [R0805]  31.37,77.98 90 bottom
R64  12k  [R0805]  56.77,216.66 90 bottom
R65  12k  [R0805]  41.78,221.36 0 bottom
R66  10k  [R0805]  42.67,211.84 90 bottom
R67  5.1  [0204/7]  72.14,233.81 270 top
R68  12k  [R0805]  55.24,232.66 270 bottom
R69  1k2  [R0805]  55.24,237.87 270 bottom
R70  470  [R0805]  59.69,211.71 90 bottom
R71  47  [R0805]  28.96,106.81 0 top
R72  47  [R0805]  28.96,101.09 0 top
R73  47  [R0805]  28.96,95.63 0 top
R74  100  [R0805]  19.43,81.03 270 bottom
R75  150  [R0805]  15.24,73.03 0 bottom
R76  10k  [R0805]  22.73,77.09 90 bottom
R77  2k2  [R0805]  20.95,24.64 0 top
R78  2k2  [R0805]  20.95,29.08 180 top
R79  4k7  [R0805]  20.95,26.92 180 top
R80  4k7  [R0805]  106.68,7.11 270 bottom
R81  10k  [R0805]  182.5,28.19 0 bottom
R82  4k7  [R0805]  182.25,19.81 180 bottom
R83  100  [R0805]  42.8,70.48 180 bottom
R84  470  [R0805]  53.34,70.36 0 bottom
R85  1M  [R0805]  215.65,33.53 270 top
RN1  10k  [RN-10]  18.16,209.55 270 top
RN2  10k  [RN-10]  38.1,201.93 270 top
RN3  10k  [RN-9]  136.4,205.74 90 top
RN4  10k  [RN-9]  138.94,227.33 270 top
RN5  4k7  [RN-9]  140.59,204.47 90 top
RN6  10k  [RN-9]  169.29,179.07 270 top
RN7  10k  [RN-9]  169.29,156.21 90 top
RN8  10k  [RN-9]  140.08,158.75 270 top
RN9  4k7  [RN-9]  136.91,174.88 270 top
RN10  4k7  [RN-10]  160.53,65.53 270 top
T1  2N3904  [TO92]  20.95,107.7 270 top
T2  2N3904  [TO92]  35.05,105.54 270 top
T3  2N3904  [TO92]  35.05,96.52 270 top
T4  2N3904  [TO92]  35.05,87.5 270 top
T5  2N3904  [TO92]  34.92,77.47 270 top
T6  2N3904  [TO92]  17.78,76.07 0 top
T7  2N3904  [TO92]  176.53,27.3 270 top
U$6  Monitor  [DIN-13]  10.16,93.98 90 top
VGA  [2X08]  23.62,92.58 270 top
X1  TC46C  [TC46]  218.19,33.53 0 top
X2  2.4576MHz  [QS]  100.33,210.31 0 top
X3  [SSV-BD06]  0.13,234.7 270 top
X4  5566-20  [5566-20]  202.69,236.22 180 top

## Library data of the parts
C1-C72 L1-L5 R1-R85 = rcl
CN1 = adafruit
D1 = diode
D2-D13 = _hhn_diodes_smd
IC1 IC2 = micro-motorola; MF: NTE ELECTRONICS; MPN: NTE6850; OC_FARNELL: 4899775; OC_NEWARK: 31C2457
IC3 IC4 = micro-mc68000; OC_FARNELL: unknown; OC_NEWARK: unknown
IC5-IC9 = AtariST
IC10 = WD1772
IC11 IC12 = pal; MF: FARNELL; MPN: GAL20V8B-25QP; OC_FARNELL: 3327462; OC_NEWARK: 70C8546
IC13 = microchip; MF: MICROCHIP; MPN: PIC16F872-I/SP; OC_FARNELL: 9761012; OC_NEWARK: 12C1945
IC14-IC16 IC19-IC25 IC28-IC30 = 74xx-eu
IC17 IC18 = 1488 1489
IC26 = st-microelectronics; MPN: NE556; OC_FARNELL: 2349784; OC_NEWARK: 83C0108
IC27 = TL497
IC31 IC32 = 39SF020
IC33 = 74xx-little-de
ISA1 = con-pc
J1 = SparkFun-Connectors; PROD_ID: CONN-08774; SF_ID: PRT-08032
J3 J6 = SparkFun-Connectors; PROD_ID: CONN-09904
J4 J5 = DIN5
JP1-JP14 VGA = pinhead
OK1 = optocoupler; MF: FAIRCHILD SEMICONDUCTOR; MPN: H11L1-M; OC_FARNELL: 1021127; OC_NEWARK: 72K8643
PWR = jumper
Q1 Q2 X2 = special
Q3 = transistor-pnp
RN1-RN10 = resistor-net; OC_FARNELL: unknown; OC_NEWARK: unknown
T1-T7 = transistor
U$6 = 13PINDIN
X1 = crystal; OC_FARNELL: unknown; OC_NEWARK: unknown
X3 = con-yamaichi; OC_FARNELL: unknown; OC_NEWARK: unknown
X4 = con-molex; OC_FARNELL: unknown; OC_NEWARK: unknown

## Nets
2: J5.2
2MHZ: IC5.54 IC7.22
4MHZ: IC3.35 IC6.19
8MHZ: IC4.15 IC5.34 IC6.20 IC9.39 IC10.18 IC12.1
16MHZ: IC6.5 IC8.39
32MHZ: C71.1 IC8.2 IC33.4 L5.1 Q2.2 R85.1 X1.8
500KHZ: IC1.3 IC1.4 IC2.3 IC2.4 IC5.43
6850CS: IC1.8 IC2.8 IC5.42
!BG: IC4.11 IC5.27 RN5.4
!BGACK: IC4.12 IC5.41 RN5.3
!BLANK: D5.C D6.C D7.C IC5.36
!BR: IC4.13 IC5.40 RN5.2
!DIR: IC19.6 JP5.18
!DRV0: IC7.19 JP5.14
!DRV1: IC7.20 JP5.12
!INDEX: IC10.24 JP5.8 R36.2
!MOTEB: IC20.12 JP5.10 JP5.16
!RDATA: IC10.19 JP5.30 R37.2
!SIDE0: IC19.12 JP5.32
!STEP: JP5.20 R32.1
!TRACK0: IC10.23 JP5.26 R35.2
!WDATA: JP5.22 R33.1
!WGATE: IC19.8 JP5.24
!WP: IC10.25 JP5.28 R34.2
+12V: C52.+ C54.1 IC17.14 IC27.6 R68.2 R70.2
+12V_ATX: ISA1.B9 X4.10
-12V: C51.- C53.1 D8.A IC17.1
-12V_ATX: ISA1.B7 X4.12
A1: IC1.11 IC2.11 IC3.2 IC4.29 IC5.56 IC6.50 IC8.36 IC9.2 IC16.11 IC31.12 IC32.12 ISA1.A30 RN8.6
A2: IC1.9 IC2.10 IC3.3 IC4.30 IC5.57 IC6.49 IC8.35 IC31.11 IC32.11 ISA1.A29 JP4.35 RN8.7
A3: IC3.4 IC4.31 IC5.58 IC6.48 IC8.34 IC31.10 IC32.10 ISA1.A28 JP4.33 RN8.8
A4: IC3.5 IC4.32 IC5.59 IC6.47 IC8.33 IC31.9 IC32.9 ISA1.A27 JP4.36 RN8.9
A5: IC3.6 IC4.33 IC5.60 IC6.46 IC8.32 IC11.11 IC31.8 IC32.8 ISA1.A26 RN7.2
A6: IC4.34 IC5.61 IC6.45 IC31.7 IC32.7 ISA1.A25 RN7.3
A7: IC4.35 IC5.62 IC6.43 IC31.6 IC32.6 ISA1.A24 RN7.4
A8: IC4.36 IC5.63 IC6.42 IC31.5 IC32.5 ISA1.A23 RN7.5
A9: IC4.37 IC5.64 IC6.41 IC31.27 IC32.27 ISA1.A22 RN7.6
A10: IC4.38 IC5.65 IC6.40 IC31.26 IC32.26 ISA1.A21 RN7.7
A11: IC4.39 IC5.66 IC6.39 IC31.23 IC32.23 ISA1.A20 RN7.8
A12: IC4.40 IC5.67 IC6.38 IC31.25 IC32.25 ISA1.A19 RN7.9
A13: IC4.41 IC5.68 IC6.37 IC31.4 IC32.4 ISA1.A18 RN6.9
A14: IC4.42 IC5.2 IC6.36 IC11.10 IC31.28 IC32.28 ISA1.A17 RN6.8
A15: IC4.43 IC5.3 IC6.35 IC11.9 IC31.29 IC32.29 ISA1.A16 RN6.7
A16: IC4.44 IC5.4 IC6.11 IC11.8 IC12.23 IC31.3 IC32.3 ISA1.A15 RN6.6
A17: IC4.45 IC5.5 IC6.12 IC11.7 IC12.22 IC31.2 IC32.2 ISA1.A14 ISA1.C8 RN6.5
A18: IC4.46 IC5.6 IC6.13 IC11.6 IC12.2 ISA1.A13 ISA1.C7 RN6.4
A19: IC4.47 IC5.7 IC6.14 IC11.5 IC12.3 ISA1.A12 ISA1.C6 RN6.3
A20: IC4.48 IC5.8 IC6.15 IC11.4 IC12.4 RN6.2
A21: IC4.50 IC5.9 IC6.16 IC11.3 IC12.5 R46.1
A22: IC4.51 IC5.10 IC11.2 IC12.6 R45.1
A23: IC4.52 IC5.11 IC11.1 IC12.7 R44.1
ACSI10: IC14.5 IC30.3 JP6.10 R23.1
AS: IC4.6 IC5.12 IC6.32 IC11.13 IC12.8 RN5.9
AUDIO_IN: C36.1 U$6.PIN5
AUDIO_OUT: C38.- J1.RING J1.TIP U$6.PIN1
B: R59.1 U$6.PIN10
B2: R73.1 VGA.3
B13: IC12.17 ISA1.B13
B14: IC12.18 ISA1.B14
BERR: IC4.22 IC5.30 RN9.6
BUSY: IC3.19 IC3.22 JP8.11 R7.1
CAS0H: JP9.23 R1.2
CAS0L: JP9.21 R2.2
CAS1H: JP9.24 R5.2
CAS1L: JP9.22 R6.2
CE1: IC11.21 IC21.4
CE2: IC11.22 IC21.5
CSYNC: R74.1 U$6.PIN2
D0: IC3.37 IC4.5 IC6.65 IC9.4 IC23.12 IC25.11 IC29.8 IC31.13 ISA1.C11 RN4.9
D0': IC29.12 JP4.17
D1: IC3.38 IC4.4 IC6.66 IC9.5 IC23.15 IC25.13 IC29.6 IC31.14 ISA1.C12 RN4.8
D1': IC29.14 JP4.15
D2: IC3.39 IC4.3 IC6.67 IC9.6 IC23.16 IC25.15 IC29.4 IC31.15 ISA1.C13 RN4.7
D2': IC29.16 JP4.13
D3: IC3.40 IC4.2 IC6.68 IC9.7 IC23.19 IC25.17 IC29.2 IC31.17 ISA1.C14 RN4.6
D3': IC29.18 JP4.11
D4: IC3.41 IC4.1 IC6.1 IC9.8 IC23.2 IC25.2 IC28.8 IC31.18 ISA1.C15 RN4.5
D4': IC28.12 JP4.9
D5: IC3.42 IC4.64 IC6.2 IC9.9 IC23.5 IC25.4 IC28.6 IC31.19 ISA1.C16 RN4.4
D5': IC28.14 JP4.7
D6: IC3.43 IC4.63 IC6.3 IC9.10 IC23.6 IC25.6 IC28.4 IC31.20 ISA1.C17 RN4.3
D6': IC28.16 JP4.5
D7: IC3.44 IC4.62 IC6.4 IC9.11 IC23.9 IC25.8 IC28.2 IC31.21 ISA1.C18 RN4.2
D7': IC28.18 JP4.3
D8: IC1.22 IC2.22 IC4.61 IC5.48 IC7.37 IC9.12 IC22.12 IC24.11 IC28.3 IC32.13 ISA1.A9 RN3.9
D8': IC28.17 JP4.4
D9: IC1.21 IC2.21 IC4.60 IC5.49 IC7.36 IC9.13 IC22.9 IC24.8 IC28.5 IC32.14 ISA1.A8 RN3.8
D9': IC28.15 JP4.6
D10: IC1.20 IC2.20 IC4.59 IC7.35 IC9.14 IC22.15 IC24.13 IC28.7 IC32.15 ISA1.A7 RN3.7
D10': IC28.13 JP4.8
D11: IC1.19 IC2.19 IC4.58 IC7.34 IC9.15 IC22.6 IC24.6 IC28.9 IC32.17 ISA1.A6 RN3.6
D11': IC28.11 JP4.10
D12: IC1.18 IC2.18 IC4.57 IC7.33 IC9.16 IC22.16 IC24.15 IC29.3 IC32.18 ISA1.A5 RN3.5
D12': IC29.17 JP4.12
D13: IC1.17 IC2.17 IC4.56 IC7.32 IC9.17 IC22.5 IC24.4 IC29.5 IC32.19 ISA1.A4 RN3.4
D13': IC29.15 JP4.14
D14: IC1.16 IC2.16 IC4.55 IC7.31 IC9.18 IC22.19 IC24.17 IC29.7 IC32.20 ISA1.A3 RN3.3
D14': IC29.13 JP4.16
D15: IC1.15 IC2.15 IC4.54 IC7.30 IC9.19 IC22.2 IC24.2 IC29.9 IC32.21 ISA1.A2 RN3.2
D15': IC29.11 JP4.18
DD0: IC9.36 IC10.5 JP6.1 RN10.2
DD1: IC9.35 IC10.6 JP6.2 RN10.3
DD2: IC9.34 IC10.7 JP6.3 RN10.4
DD3: IC9.33 IC10.8 JP6.4 RN10.5
DD4: IC9.32 IC10.9 JP6.5 RN10.6
DD5: IC9.31 IC10.10 JP6.6 RN10.7
DD6: IC9.30 IC10.11 JP6.7 RN10.8
DD7: IC9.29 IC10.12 JP6.8 RN10.9
DE: IC3.20 IC5.39 IC6.52 IC8.37
DEV: IC5.25 IC6.31
DIR: IC11.18 IC28.1 IC29.1 JP4.25
DMA: IC5.24 IC6.24
DQ0: IC8.3 IC23.13 IC25.9 JP9.2
DQ1: IC8.4 IC23.14 IC25.7 JP9.4
DQ2: IC8.5 IC23.17 IC25.5 JP9.6
DQ3: IC8.6 IC23.18 IC25.3 JP9.8
DQ4: IC8.7 IC23.3 IC25.18 JP9.10
DQ5: IC8.8 IC23.4 IC25.16 JP9.12
DQ6: IC8.9 IC23.7 IC25.14 JP9.14
DQ7: IC8.10 IC23.8 IC25.12 JP9.16
DQ8: IC8.12 IC22.13 IC24.9 JP9.15
DQ9: IC8.13 IC22.8 IC24.12 JP9.13
DQ10: IC8.14 IC22.14 IC24.7 JP9.11
DQ11: IC8.15 IC22.7 IC24.14 JP9.9
DQ12: IC8.16 IC22.17 IC24.5 JP9.7
DQ13: IC8.17 IC22.4 IC24.16 JP9.5
DQ14: IC8.18 IC22.18 IC24.3 JP9.3
DQ15: IC8.19 IC22.3 IC24.18 JP9.1
DTACK: IC3.46 IC4.10 IC5.31 IC6.53 IC30.8 IC30.11 RN5.5 T7.1
E: IC1.14 IC2.14 IC4.20
EIFRX: IC1.2 IC13.17
EIFTX: IC1.6 IC13.18
FC0: IC4.28 IC5.15 RN8.5
FC1: IC4.27 IC5.14 RN8.4
FC2: IC4.26 IC5.13 RN8.3
FCS: IC5.26 IC9.3
G: R55.1 U$6.PIN6
G2: R72.1 VGA.2
GG: IC11.15 IC28.19 IC29.19
GND: C1.2 C2.2 C3.1 C4.1 C5.2 C6.2 C8.2 C9.2 C10.2 C11.2 C12.2 C13.2 C14.2 C15.2 C16.2 C17.2 C18.2 C19.2 C20.2 C21.2 C22.2 C23.2 C24.2 C25.2 C26.2 C27.2 C28.2 C29.2 C30.2 C31.2 C32.2 C33.2 C34.- C35.2 C39.1 C40.1 C41.1 C42.2 C43.2 C44.2 C45.1 C46.1 C47.1 C48.1 C49.1 C51.+ C52.- C53.2 C54.2 C55.2 C56.2 C57.2 C58.- C59.2 C60.2 C61.- C62.- C63.- C64.- C65.2 C66.2 C67.- C68.- C69.- C70.2 C71.2 C72.2 CN1.GND D9.C IC1.1 IC1.23 IC1.24 IC2.1 IC2.9 IC2.23 IC2.24 IC3.34 IC3.36 IC4.16 IC4.53 IC5.35 IC5.52 IC6.27 IC6.61 IC7.1 IC7.24 IC8.20 IC9.20 IC9.28 IC10.14 IC10.26 IC11.12 IC12.12 IC12.13 IC13.8 IC13.19 IC14.7 IC15.7 IC16.7 IC17.7 IC18.7 IC19.7 IC20.3 IC20.5 IC20.7 IC20.9 IC20.11 IC21.7 IC22.10 IC23.10 IC24.10 IC25.10 IC26.7 IC27.2 IC27.4 IC27.5 IC27.8 IC28.10 IC29.10 IC30.7 IC31.16 IC31.24 IC32.16 IC32.24 IC33.3 ISA1.A11 ISA1.B1 ISA1.B10 ISA1.B31 ISA1.C2 ISA1.C3 ISA1.C4 ISA1.C5 ISA1.D18 J1.SLEEVE J3.8 J3.G1 J3.G2 J4.2 J4.SHIELD1 J4.SHIELD2 J4.SHIELD3 J5.SHIELD1 J5.SHIELD2 J5.SHIELD3 J6.8 J6.G1 J6.G2 JP1.1 JP3.3 JP4.2 JP4.19 JP4.22 JP4.24 JP4.26 JP4.28 JP4.30 JP4.40 JP5.1 JP5.3 JP5.5 JP5.7 JP5.9 JP5.11 JP5.13 JP5.15 JP5.17 JP5.19 JP5.21 JP5.23 JP5.25 JP5.27 JP5.29 JP5.31 JP5.33 JP6.11 JP6.13 JP6.15 JP6.17 JP7.1 JP7.7 JP8.18 JP8.19 JP8.20 JP8.21 JP8.22 JP8.23 JP8.24 JP8.25 JP9.18 JP9.20 JP12.3 JP13.1 OK1.5 Q3.1 R4.1 R22.2 R39.1 R40.1 R43.1 R47.1 R53.1 R54.1 R57.1 R58.1 R61.1 R62.1 R69.1 R75.2 R77.1 T7.3 U$6.M1 U$6.M2 U$6.PIN13 VGA.4 VGA.5 VGA.6 VGA.7 VGA.8 VGA.10 VGA.11 X1.7 X3.1-3 X3.2-3 X3.G1 X3.G2 X3.G3 X3.G4 X4.3 X4.5 X4.7 X4.13 X4.15 X4.16 X4.17
GNDBREAK: CN1.GNDBREAK
GPO: IC7.15 U$6.PIN3
HALT: IC4.17 IC15.6 IC15.8 RN9.3
HSYNC: D11.C IC5.37 U$6.PIN9 VGA.13
IACK: IC3.45 IC5.50
INTRQ: IC30.1 IC30.2 JP4.31 R77.2
IOB0: IC7.13 JP8.2
IOB1: IC7.12 JP8.3
IOB2: IC7.11 JP8.4
IOB3: IC7.10 JP8.5
IOB4: IC7.9 JP8.6
IOB5: IC7.8 JP8.7
IOB6: IC7.7 JP8.8
IOB7: IC7.6 JP8.9
IORDY: IC30.4 IC30.5 JP4.27 R78.1
IOWR: IC11.19 JP4.23
IPL0: IC4.25 RN9.9
IPL1: IC4.24 IC5.32 RN9.8
IPL2: IC4.23 IC5.33 RN9.7
LATCH: IC6.9 IC22.11 IC23.11
LDS: D12.C IC3.47 IC4.8 IC5.46 IC6.17 ISA1.C1 RN5.7
LOAD: IC6.29 IC8.11
MAD0: IC6.59 JP9.28
MAD1: IC6.58 JP9.27
MAD2: IC6.57 JP9.30
MAD3: IC6.56 JP9.29
MAD4: IC6.55 JP9.32
MAD5: IC6.54 JP9.31
MAD6: IC6.60 JP9.34
MAD7: IC6.62 JP9.33
MAD8: IC6.63 JP9.36
MAD9: IC6.64 JP9.35
MEMRD: IC12.16 ISA1.B12
MEMWR: IC12.15 ISA1.B11
MFPCS: IC3.48 IC5.51
MFPINT: IC3.32 IC5.44 R9.1
MONO: IC8.30 R60.2
MONOMON: IC3.29 R12.1 U$6.PIN4
N$1: IC13.1 JP3.1 RN1.2
N$2: C3.2 IC13.10 Q1.1
N$3: IC13.28 JP3.4
N$4: IC13.27 JP3.5
N$5: C4.2 IC13.9 Q1.2
N$6: C41.2 C68.+ IC8.40 L2.1 R48.2 R49.2 R50.2
N$7: IC13.3 J3.1 RN1.3
N$8: IC13.4 J3.2 RN1.4
N$9: IC13.5 J3.3 RN1.5
N$10: IC13.24 RN2.2 X3.2-5
N$11: IC13.22 RN2.4 X3.1-5
N$12: IC13.11 J6.1 RN1.8
N$13: IC13.12 J6.2 RN1.9
N$14: IC13.13 J6.3 RN2.7
N$15: IC13.14 J6.4 RN2.8
N$16: IC13.15 J6.6 RN2.9
N$17: D2.C R3.2 R4.2 T2.2
N$18: C48.2 IC26.11
N$19: IC13.23 RN2.3 X3.2-1
N$20: IC13.21 RN2.5 X3.1-1
N$21: IC7.16 JP8.1
N$22: IC7.27 IC16.1
N$23: IC7.29 IC16.13
N$24: IC1.7 IC2.7 IC3.26 R8.1
N$25: R70.1 U$6.PIN8
N$26: IC13.7 J3.6 RN1.7
N$27: IC3.7 IC3.10 IC3.16
N$28: IC3.9 IC18.3
N$29: IC13.6 J3.4 RN1.6
N$30: IC3.8 IC17.9 IC17.10
N$31: IC3.25 R11.1
N$32: IC8.1 R22.1
N$33: IC8.27 R13.1
N$34: IC8.28 R14.1
N$35: IC8.29 R15.1
N$36: IC6.6 R1.1
N$37: IC6.7 R2.1
N$38: IC8.24 R16.1
N$39: IC6.22 R5.1
N$40: IC6.21 R6.1
N$41: IC8.25 R17.1
N$42: IC8.26 R18.1
N$43: IC8.21 R19.1
N$44: RN8.2
N$45: IC8.22 R20.1
N$46: IC8.23 R21.1
N$47: D2.A D5.A R13.2 R14.2 R15.2 R48.1
N$48: D3.A D6.A R16.2 R17.2 R18.2 R49.1
N$49: D4.A D7.A R19.2 R20.2 R21.2 R50.1
N$50: IC17.8 JP7.2
N$51: IC18.1 JP7.3
N$52: IC17.11 JP7.4
N$53: IC18.13 JP7.5
N$54: IC18.4 JP7.8
N$55: IC18.10 JP7.22
N$56: IC17.3 JP7.20
N$57: C19.1 IC18.5
N$58: C20.1 IC18.9
N$59: C18.1 IC18.12
N$60: C17.1 IC18.2
N$61: IC3.24 IC18.11
N$62: IC3.23 IC18.6
N$63: IC3.28 IC18.8
N$64: IC7.17 IC17.2
N$65: IC7.18 IC17.12 IC17.13
N$66: IC10.28 IC16.6
N$67: IC14.6 IC16.5
N$68: IC30.6 IC30.9 IC30.10 R79.1
N$69: IC3.27 IC16.4
N$70: IC2.6 IC14.1
N$71: IC2.2 IC14.3 OK1.4 R24.1
N$72: IC14.2 IC15.13
N$73: IC14.4 IC15.11
N$74: J4.1 R28.1
N$75: J4.4 R29.1
N$76: IC9.26 IC10.3 JP6.16
N$77: J4.5 R25.1
N$78: J4.3 R26.1
N$79: IC15.10 R26.2
N$80: IC15.12 R25.2
N$81: J5.4 R27.1
N$82: D1.C OK1.1 R27.2
N$83: D1.A J5.5 OK1.2
N$84: IC9.27 IC10.4
N$85: IC9.25 IC10.2 JP6.18
N$86: IC9.22 IC10.1
N$87: IC9.21 IC10.27
N$88: IC9.24 JP6.9
N$89: IC9.37 JP6.14
N$90: IC20.1 JP6.19 R31.1
N$91: IC9.23 IC20.2 R30.1
N$92: IC10.17 IC19.5
N$93: IC19.4 R32.2
N$94: IC10.20 IC20.13
N$95: IC7.21 IC19.1
N$96: IC19.2 IC19.13 R38.1
N$97: C36.2 C37.1 C39.2 IC7.3 IC7.4 IC7.38 R39.2
N$98: IC10.16 IC19.3
N$99: IC10.22 IC19.11
N$100: IC10.21 IC19.9
N$101: IC19.10 R33.2
N$102: R47.2 R51.2 R71.2 T2.3
N$103: C37.2 R40.2 R41.1 T1.2
N$104: JP4.39 R84.1
N$105: C38.+ R42.1 T1.1
N$106: R43.2 T1.3
N$107: C42.1 IC3.17 X2.1
N$108: C43.1 IC3.18 X2.2
N$109: C40.2 L1.1 R41.2 R42.2
N$110: D3.C R52.2 R53.2 T3.2
N$111: IC11.20 IC30.12 IC30.13
N$112: C47.2 IC26.3
N$113: C45.2 IC26.8 IC26.12 R64.1
N$114: R54.2 R55.2 R72.2 T3.3
N$115: C56.1 IC27.13 L3.1 R67.2
N$116: C46.2 IC26.1 IC26.2 R65.1
N$117: R63.1 U$6.PIN11
N$118: C50.+ IC27.7 IC27.10 L3.2
N$119: R60.1 R61.2 T5.2
N$120: D4.C R56.2 R57.2 T4.2
N$121: D10.A D11.A R76.2 T6.2
N$122: R58.2 R59.2 R73.2 T4.3
N$123: C59.1 L4.1 R3.1 R52.1 R56.1 T2.1 T3.1 T4.1 T5.1
N$124: R62.2 R63.2 T5.3
N$125: C49.2 IC26.6 JP1.2 R66.1
N$126: R74.2 R75.1 T6.3
N$127: C50.- D8.C D9.A
N$128: IC15.1 IC15.5 IC26.5
N$129: IC15.3 IC15.9 IC26.9
N$130: JP4.29 R83.1
N$131: IC27.1 R68.1 R69.2
N$132: JP4.20 PWR.1
N$133: C55.1 IC27.3
N$134: JP4.1 Q3.3
N$135: D12.A D13.A IC12.11 R80.1
N$136: C7.2 R81.2 T7.2
N$137: ISA1.A1
N$138: JP10.2 R84.2
N$139: JP13.2 X4.14
N$140: VGA.15
N$141: JP13.3 X4.9
N$142: C70.1 IC33.2 Q2.1 R85.2
N$143: C72.1 L5.2
N$153: JP9.39
N$154: IC12.19
N$156: C7.1 IC12.21 R81.1
N$172: JP9.38
N$173: JP9.40
N$181: ISA1.C9
N$182: ISA1.C10
R: R51.1 U$6.PIN7
R2: R71.1 VGA.1
RAM: IC5.23 IC6.33
RAS0: IC6.8 JP9.25
RAS1: IC6.18 JP9.26
RDAT: IC6.30 IC22.1 IC23.1
RDY: IC5.28 IC9.38 R10.1
RDY2: IC12.14 ISA1.A10 R82.1
RESET: IC3.21 IC4.18 IC5.22 IC7.23 IC10.13 IC12.10 IC15.2 IC15.4 JP6.12 Q3.2 RN9.2
ROM0: IC5.21 IC21.10
ROM1: IC5.20 IC21.11
ROM2: IC5.19 IC11.23 IC21.9
ROM3: IC5.18 JP14.1
ROM4: IC5.17 JP14.2
ROM_CE: IC31.22 IC32.22 JP11.2
RW: IC1.13 IC2.13 IC3.1 IC4.9 IC5.55 IC6.34 IC8.31 IC9.1 IC11.14 IC12.9 IC16.2 RN5.6
SELP: IC11.16 JP4.37
SELS: IC11.17 JP4.38
SHCS: IC6.28 IC8.38
SNDCS: IC5.53 IC16.3 IC16.12
TOS1: IC21.8 JP11.3
TOS2: IC21.6 JP11.1
TOS_SW: IC31.30 IC32.30 JP12.2
UDS: D13.C IC4.7 IC5.47 IC6.26 ISA1.A31 RN5.8
VCC: C1.1 C2.1 C5.1 C6.1 C8.1 C9.1 C10.1 C11.1 C12.1 C13.1 C14.1 C15.1 C16.1 C21.1 C22.1 C23.1 C24.1 C25.1 C26.1 C27.1 C28.1 C29.1 C30.1 C31.1 C32.1 C33.1 C34.+ C35.1 C44.1 C57.1 C58.+ C60.1 C61.+ C62.+ C63.+ C64.+ C65.1 C66.1 C67.+ C69.+ CN1.PWR IC1.10 IC1.12 IC2.12 IC3.11 IC4.14 IC4.49 IC5.1 IC6.10 IC6.44 IC7.25 IC7.28 IC7.40 IC9.40 IC10.15 IC11.24 IC12.24 IC13.20 IC14.14 IC15.14 IC16.14 IC18.14 IC19.14 IC20.14 IC21.3 IC21.14 IC22.20 IC23.20 IC24.20 IC25.20 IC26.4 IC26.10 IC26.14 IC27.14 IC28.20 IC29.20 IC30.14 IC31.31 IC31.32 IC32.31 IC32.32 IC33.5 ISA1.B3 ISA1.B29 ISA1.D16 J3.7 J6.7 JP2.1 JP2.2 JP3.2 JP9.17 JP9.19 JP10.1 JP12.1 L1.2 L2.2 L4.2 OK1.6 PWR.2 R7.2 R8.2 R9.2 R10.2 R11.2 R12.2 R23.2 R24.2 R28.2 R29.2 R30.2 R31.2 R34.1 R35.1 R36.1 R37.1 R38.2 R44.2 R45.2 R46.2 R64.2 R65.2 R66.2 R67.1 R76.1 R78.2 R79.2 R80.2 R82.2 R83.2 RN1.1 RN2.1 RN3.1 RN4.1 RN5.1 RN6.1 RN7.1 RN8.1 RN9.1 RN10.1 T6.1 VGA.16 X1.14 X3.1-4 X3.2-4 X4.4 X4.6 X4.19 X4.20
VMA: IC4.19 IC5.16 RN9.4
VPA: IC4.21 IC5.29 RN9.5
VRES: IC12.20 ISA1.B2
VSYNC: D10.C IC5.38 IC6.51 U$6.PIN12 VGA.14
WDAT: IC6.25 IC24.1 IC24.19 IC25.1 IC25.19
WE: IC6.23 JP9.37

## Tracks (layer width: path | path; a pad name or v marks a point on that pad's centre or on a via)
2MHZ  (via drill 0.5)
  Top 0.254: IC5.54 132.08,107.44 130.81,108.71 130.81,110.62 123.32,118.11 118.75,118.11 118.11,118.75 118.11,119.89 117.35,120.65 115.06,120.65 114.43,121.28 114.43,123.44 108.58,129.29 98.3,129.29 v97.92,129.67
  Bottom 0.254: v97.92,129.67 97.92,134.11 97.28,134.75 IC7.22
4MHZ  (via drill 0.5)
  Top 0.254: IC6.19 191.13,176.02 190.75,176.4 190.75,180.59 189.99,181.36 175.77,181.36 171.7,185.42 163.7,185.42 158.62,190.5 135.38,190.5 133.99,191.9 93.85,191.9 v93.22,192.53 | v93.22,196.47 92.71,196.98 90.55,196.98 89.66,197.87 IC3.35
  Bottom 0.254: v93.22,192.53 v93.22,196.47
8MHZ  (via drill 0.5)
  Top 0.254: v183.77,186.69 179.45,186.69 173.35,192.79 v171.58,192.79 | v156.72,191.77 IC4.15 | IC6.20 189.23,178.31 188.09,177.16 185.8,177.16 185.42,176.78 185.42,167.26 187.2,165.48 187.2,158.24 185.42,156.46 185.42,149.73 189.99,145.16 189.99,143.89 v184.28,138.18 | v173.74,83.69 173.23,84.2 162.18,84.2 160.02,82.04 IC9.39 | IC5.34 122.17,121.92 133.35,110.74 137.54,110.74 138.43,109.86 138.43,108.46 138.94,107.95 162.18,107.95 162.81,107.31 v184.66,107.31
  Top 0.305: IC10.18 185.04,59.18 183.77,60.45 175.51,60.45 v174.75,61.21
  Bottom 0.254: IC6.20 189.23,181.23 v183.77,186.69 | v171.58,192.79 157.73,192.79 v156.72,191.77 | v184.28,138.18 184.28,135.89 186.06,134.11 186.06,126.87 184.66,125.48 v184.66,107.31 184.66,102.49 173.74,91.57 v173.74,83.69
  Bottom 0.305: v173.74,83.69 173.74,75.56 175.01,74.3 175.01,61.47 v174.75,61.21 175.01,60.96 175.01,33.78 178.82,29.97 186.82,29.97 187.71,29.08 187.71,14.73 186.69,13.72 IC12.1
16MHZ  (via drill 0.5)
  Top 0.254: v191.52,173.48 191.39,173.48 190.25,174.62 190.25,179.71 189.36,180.59 174.62,180.59 172.34,182.88 141.73,182.88 140.59,181.74 140.59,179.45 139.83,178.69 v130.05,178.69
  Top 0.305: v124.84,156.97 v55.12,156.97
  Bottom 0.254: v130.05,178.69 130.05,165.1 129.54,164.59 127.51,164.59 125.6,162.69 125.6,157.73 v124.84,156.97 | v55.12,156.97 55.12,149.61 55.37,149.35 IC8.39
  Bottom 0.305: v191.52,173.48 194.94,173.48 196.22,174.75 205.87,174.75 206.5,174.12 206.5,171.58 205.87,170.94 IC6.5
32MHZ  (via drill 0.5)
  Top 0.406: v56.64,79.38 56.77,79.25 105.41,79.25 v106.81,77.85 | v106.81,34.54 186.18,34.54 187.83,36.2 L5.1 Q2.2 | X1.8 224.66,36.2 Q2.2 | C71.1 219.84,34.42 219.2,35.05 | 219.2,35.05 Q2.2 | IC33.4 215.62,34.45 R85.1 218.63,34.48 219.2,35.05
  Bottom 0.406: IC8.2 55.37,80.64 v56.64,79.38 | v106.81,77.85 107.44,77.22 107.44,65.28 105.79,63.63 105.79,35.56 v106.81,34.54
500KHZ  (via drill 0.5)
  Top 0.254: v56.64,151.13 57.02,151.51 82.17,151.51 82.55,151.13 v94.49,151.13 | IC1.3 IC1.4 | IC2.3 IC2.4 | IC5.43 113.03,109.22 108.97,113.28 108.97,120.02 104.78,124.21 v96.01,124.21
  Bottom 0.254: IC2.3 v56.64,151.13 | v94.49,151.13 94.74,150.88 IC1.4 96.01,146.3 v96.01,124.21
6850CS  (via drill 0.5)
  Top 0.254: IC2.8 69.34,149.48 69.98,150.11 81.53,150.11 82.17,149.48 104.65,149.48 104.9,149.22 IC1.8 | v107.7,106.68 111.12,106.68 v111.89,105.92
  Bottom 0.254: IC1.8 104.9,140.21 104.01,139.32 104.01,110.36 v107.7,106.68 | IC5.42 118.24,110.62 118.24,108.33 117.73,107.82 115.44,107.82 113.54,105.92 v111.89,105.92
!BG
  Bottom 0.254: IC5.27 116.84,132.72 119.38,135.25 119.38,136.53 124.21,141.35 128.4,141.35 129.03,141.99 129.03,161.04 130.56,162.56 131.06,162.56 131.95,163.45 131.95,193.42 132.84,194.31 138.05,194.31 139.32,195.58 144.91,195.58 145.41,196.09 145.41,201.55 145.03,201.93 IC4.11 RN5.4
!BGACK
  Bottom 0.254: IC5.41 114.17,111.76 112.9,113.03 112.9,136.27 126.24,149.61 126.24,162.43 127.76,163.96 130.3,163.96 130.94,164.59 130.94,195.96 134.37,199.39 RN5.3 IC4.12
!BLANK  (via drill 0.5)
  Top 0.254: IC5.36 119.38,119.51 118.24,120.65 118.24,122.56 117.6,123.19 115.32,123.19 115.06,123.44 115.06,124.59 109.73,129.92 101.35,129.92 100.71,130.56 v92.33,130.56 | v87.12,113.79 v93.47,113.79 v99.44,113.79
  Bottom 0.254: v92.33,130.56 92.33,125.6 93.47,124.46 93.47,116.84 | 93.47,116.84 v93.47,113.79 | v93.47,113.79 D6.C 93.42,113.71 v93.47,113.79 | 93.6,116.97 93.47,116.84 | D5.C 87.04,113.71 v87.12,113.79 | D7.C 99.52,113.71 v99.44,113.79
!BR
  Top 0.305: RN5.2 IC4.13
  Bottom 0.254: IC5.40 118.11,113.03 114.3,113.03 113.54,113.79 113.54,136.14 126.87,149.48 126.87,162.05 128.02,163.19 130.68,163.19 131.44,163.96 131.44,193.93 134.24,196.85 RN5.2
!DIR  (via drill 0.5)
  Top 0.305: IC19.6 204.98,73.15 206.25,74.42 214.25,74.42 v214.76,73.91 | v215.26,64.52 JP5.18
  Bottom 0.305: v214.76,73.91 214.76,65.02 v215.26,64.52
!DRV0  (via drill 0.5)
  Top 0.305: v98.42,119 99.19,118.24 105.92,118.24 107.06,117.09 107.06,111.89 115.44,103.5 166.75,103.5 v167.26,103 | v167.26,85.22 167.64,84.84 178.31,84.84 179.83,83.31 199.01,83.31 200.28,82.04 v218.69,82.04 | v219.07,59.44 JP5.14
  Bottom 0.305: IC7.19 97.28,120.14 v98.42,119 | v167.26,103 v167.26,85.22 | v218.69,82.04 218.69,59.82 v219.07,59.44
!DRV1  (via drill 0.5)
  Top 0.305: v100.2,119.13 106.55,119.13 107.7,117.98 107.7,112.39 115.7,104.39 167.77,104.39 v168.66,103.5 | v168.66,86.23 169.29,85.6 171.32,85.6 171.58,85.85 199.14,85.85 200.41,84.58 219.46,84.58 220.09,83.95 v220.09,83.57
  Bottom 0.305: IC7.20 99.82,119.51 v100.2,119.13 | v168.66,103.5 v168.66,86.23 | v220.09,83.57 220.09,61.21 220.6,60.71 220.6,58.04 221.62,56.9 JP5.12
!INDEX  (via drill 0.5)
  Top 0.305: JP5.8 222,51.82 220.85,52.96 202.56,52.96 v201.29,54.23
  Bottom 0.305: R36.2 IC10.24 199.14,74.42 200.28,73.28 200.28,65.66 201.29,64.64 v201.29,54.23
!MOTEB
  Top 0.305: IC20.12 223.14,54.23 JP5.10
  Bottom 0.305: JP5.10 223.9,54.36 224.54,54.99 224.54,61.34 223.9,61.98 JP5.16
!RDATA  (via drill 0.5)
  Top 0.305: JP5.30 216.15,79.76 v215.26,78.87 | v214.88,61.72 IC10.19
  Bottom 0.305: R37.2 IC10.19 | v215.26,78.87 215.26,76.83 216.41,75.69 216.41,63.25 v214.88,61.72
!SIDE0
  Top 0.305: JP5.32 222.25,82.3 220.73,80.77 IC19.12
!STEP
  Top 0.305: R32.1 214.12,65.15 216.03,67.06 JP5.20
!TRACK0
  Top 0.305: JP5.26 219.07,74.68 216.28,71.88 IC10.23
  Bottom 0.305: IC10.23 194.37,71.88 R35.2
!WDATA
  Top 0.305: R33.1 214.5,67.82 216.28,69.6 JP5.22
!WGATE
  Top 0.305: JP5.24 218.19,72.14 216.66,70.61 IC19.8
!WP
  Top 0.305: JP5.28 220.98,77.22 220.73,76.96 IC10.25
  Bottom 0.305: IC10.25 R34.2
+12V
  Top 0.406: IC27.6 61.85,224.79 62.99,223.65 C52.+ 65.91,220.34 77.6,220.34 78.49,221.23 78.49,229.11 79.12,229.74 IC17.14
  Bottom 0.305: R70.2 62.55,212.66 62.99,213.11 62.99,214.31 C54.1
  Bottom 0.406: R68.2 55.24,226.06 56.52,224.79 IC27.6 | C54.1 62.93,217.36 C52.+
+12V_ATX
  Top 0.61: X4.10 229.28,238.97 230.63,237.62 230.63,232.03 233.04,229.62 237.24,229.62 239.27,227.58 239.27,189.23 241.3,187.2 241.3,183.9 239.27,181.86 239.27,144.65 241.17,142.75 241.17,138.56 239.27,136.65 239.27,90.04 232.41,83.19 232.41,30.61 223.27,21.46 223.27,11.05 214.25,2.03 46.1,2.03 45.72,2.41 ISA1.B9
-12V
  Top 0.406: C51.- 79.5,215.77 80.77,217.04 IC17.1
  Bottom 0.406: C51.- D8.A 73.84,218.44 C53.1
-12V_ATX
  Top 0.61: X4.12 187.99,234.85 189.99,236.85 189.99,240.92 190.63,241.55 197.99,241.55 198.63,240.92 198.63,237.87 199.77,236.73 210.06,236.73 211.2,237.87 211.2,240.54 212.22,241.55 230.38,241.55 232.66,239.27 232.66,233.43 234.31,231.78 238.12,231.78 241.3,228.6 241.3,189.36 242.7,187.96 242.7,182.88 241.3,181.48 241.3,145.16 242.7,143.76 242.7,136.78 241.17,135.25 241.17,89.92 233.68,82.42 233.68,29.72 224.66,20.7 224.66,10.29 215.39,1.02 41.15,1.02 40.64,1.52 ISA1.B7
A1  (via drill 0.5)
  Top 0.254: IC31.12 71.37,46.48 72.39,47.5 82.8,47.5 83.82,46.48 IC32.12 87.63,46.48 88.65,47.5 v115.06,47.5 | IC4.29 RN8.6 v134.11,156.21 133.1,155.19 v112.52,155.19 77.09,155.19 | v46.35,158.62 46.86,158.12 49.66,158.12 52.58,155.19 77.09,155.19 | v76.96,155.19 76.96,155.07 77.09,155.19 | v77.22,114.55 63.5,114.55 v62.99,114.05 | v29.46,147.32 29.84,147.7 44.83,147.7 v45.97,148.84 | IC9.2 v115.06,82.04
  Top 0.305: v187.2,145.54 181.23,145.54 180.59,144.91 178.44,144.91 177.8,145.54 171.83,145.54 171.2,144.91 137.92,144.91 v137.16,145.67
  Top 0.406: v99.95,23.24 v114.3,23.24
  Bottom 0.254: v115.06,47.5 v115.06,82.04 115.06,85.72 134.62,105.41 IC5.56 | v76.96,155.19 IC2.11 76.96,146.05 78.11,144.91 78.11,115.44 v77.22,114.55 | IC1.11 v112.52,155.19 | v62.99,114.05 IC8.36 | IC16.11 30.73,140.84 29.46,142.11 v29.46,147.32 | v45.97,148.84 46.35,149.22 v46.35,158.62 46.35,175.9 53.21,182.75 58.55,182.75 59.18,183.39 IC3.2
  Bottom 0.305: v134.11,156.21 133.1,155.19 133.1,127.25 130.94,125.09 130.94,113.92 133.1,111.76 133.1,108.2 IC5.56 | IC6.50 189.23,147.57 v187.2,145.54 | v137.16,145.67 137.16,155.57 137.79,156.21 RN8.6
  Bottom 0.406: v114.3,23.24 114.3,28.07 115.06,28.83 v115.06,47.5 | ISA1.A30 99.06,22.35 v99.95,23.24
A2  (via drill 0.5)
  Top 0.254: IC31.11 71.12,49.02 72.14,50.04 82.8,50.04 83.82,49.02 IC32.11 98.3,49.02 99.31,50.04 115.57,50.04 v116.08,49.53 | IC4.30 RN8.7 v135.13,153.67 135,153.54 131.06,153.54 130.3,154.31 v107.44,154.31 v74.42,154.31 52.2,154.31 49.78,156.72 47.62,156.72 v47.24,157.1 | IC8.35 65.53,95.12 66.17,94.49 124.97,94.49 v125.35,94.87
  Top 0.305: v183.9,147.83 183.64,147.57 181.86,147.57 181.23,148.21 176.91,148.21 176.28,147.57 167.39,147.57 166.88,147.07 146.94,147.07 v146.56,147.45 | JP4.35 46.99,65.53 44.83,65.53 44.45,65.15 44.45,63.12 46.35,61.21 47.75,61.21 56.52,52.45 56.52,50.04 57.53,49.02 IC31.11
  Top 0.406: v98.42,24.26 v115.44,24.26
  Bottom 0.254: v116.08,49.53 116.08,85.6 v125.35,94.87 135.89,105.41 135.89,107.19 134.62,108.46 IC5.57 | v47.24,157.1 47.24,175.77 53.59,182.12 60.71,182.12 61.85,183.26 61.85,184.4 IC3.3 | IC2.10 v74.42,154.31 | IC1.9 v107.44,154.31
  Bottom 0.305: v135.13,153.67 133.6,152.15 133.6,127.64 135.89,125.35 135.89,111.63 134.62,110.36 IC5.57 | IC6.49 186.69,155.45 185.42,154.18 185.42,149.35 v183.9,147.83 | v146.56,147.45 146.43,147.57 146.43,153.16 145.92,153.67 IC4.30
  Bottom 0.406: ISA1.A29 96.52,22.35 v98.42,24.26 | v115.44,24.26 115.44,27.3 116.08,27.94 v116.08,49.53
A3  (via drill 0.5)